# Altium PCB VYLTIOT0OSM-SF.PcbDoc
Units mm, origin at the board's own origin, x right, y up, seen from the top; angles counter-clockwise.
Board outline 30 x 30 mm, 4 copper layers (L1, L2, L3, L4), stack 1.58 mm thick; 360 components, 291 nets, 445 pads, 58 vias.
Unrouted connection lines stored in the file: 97.
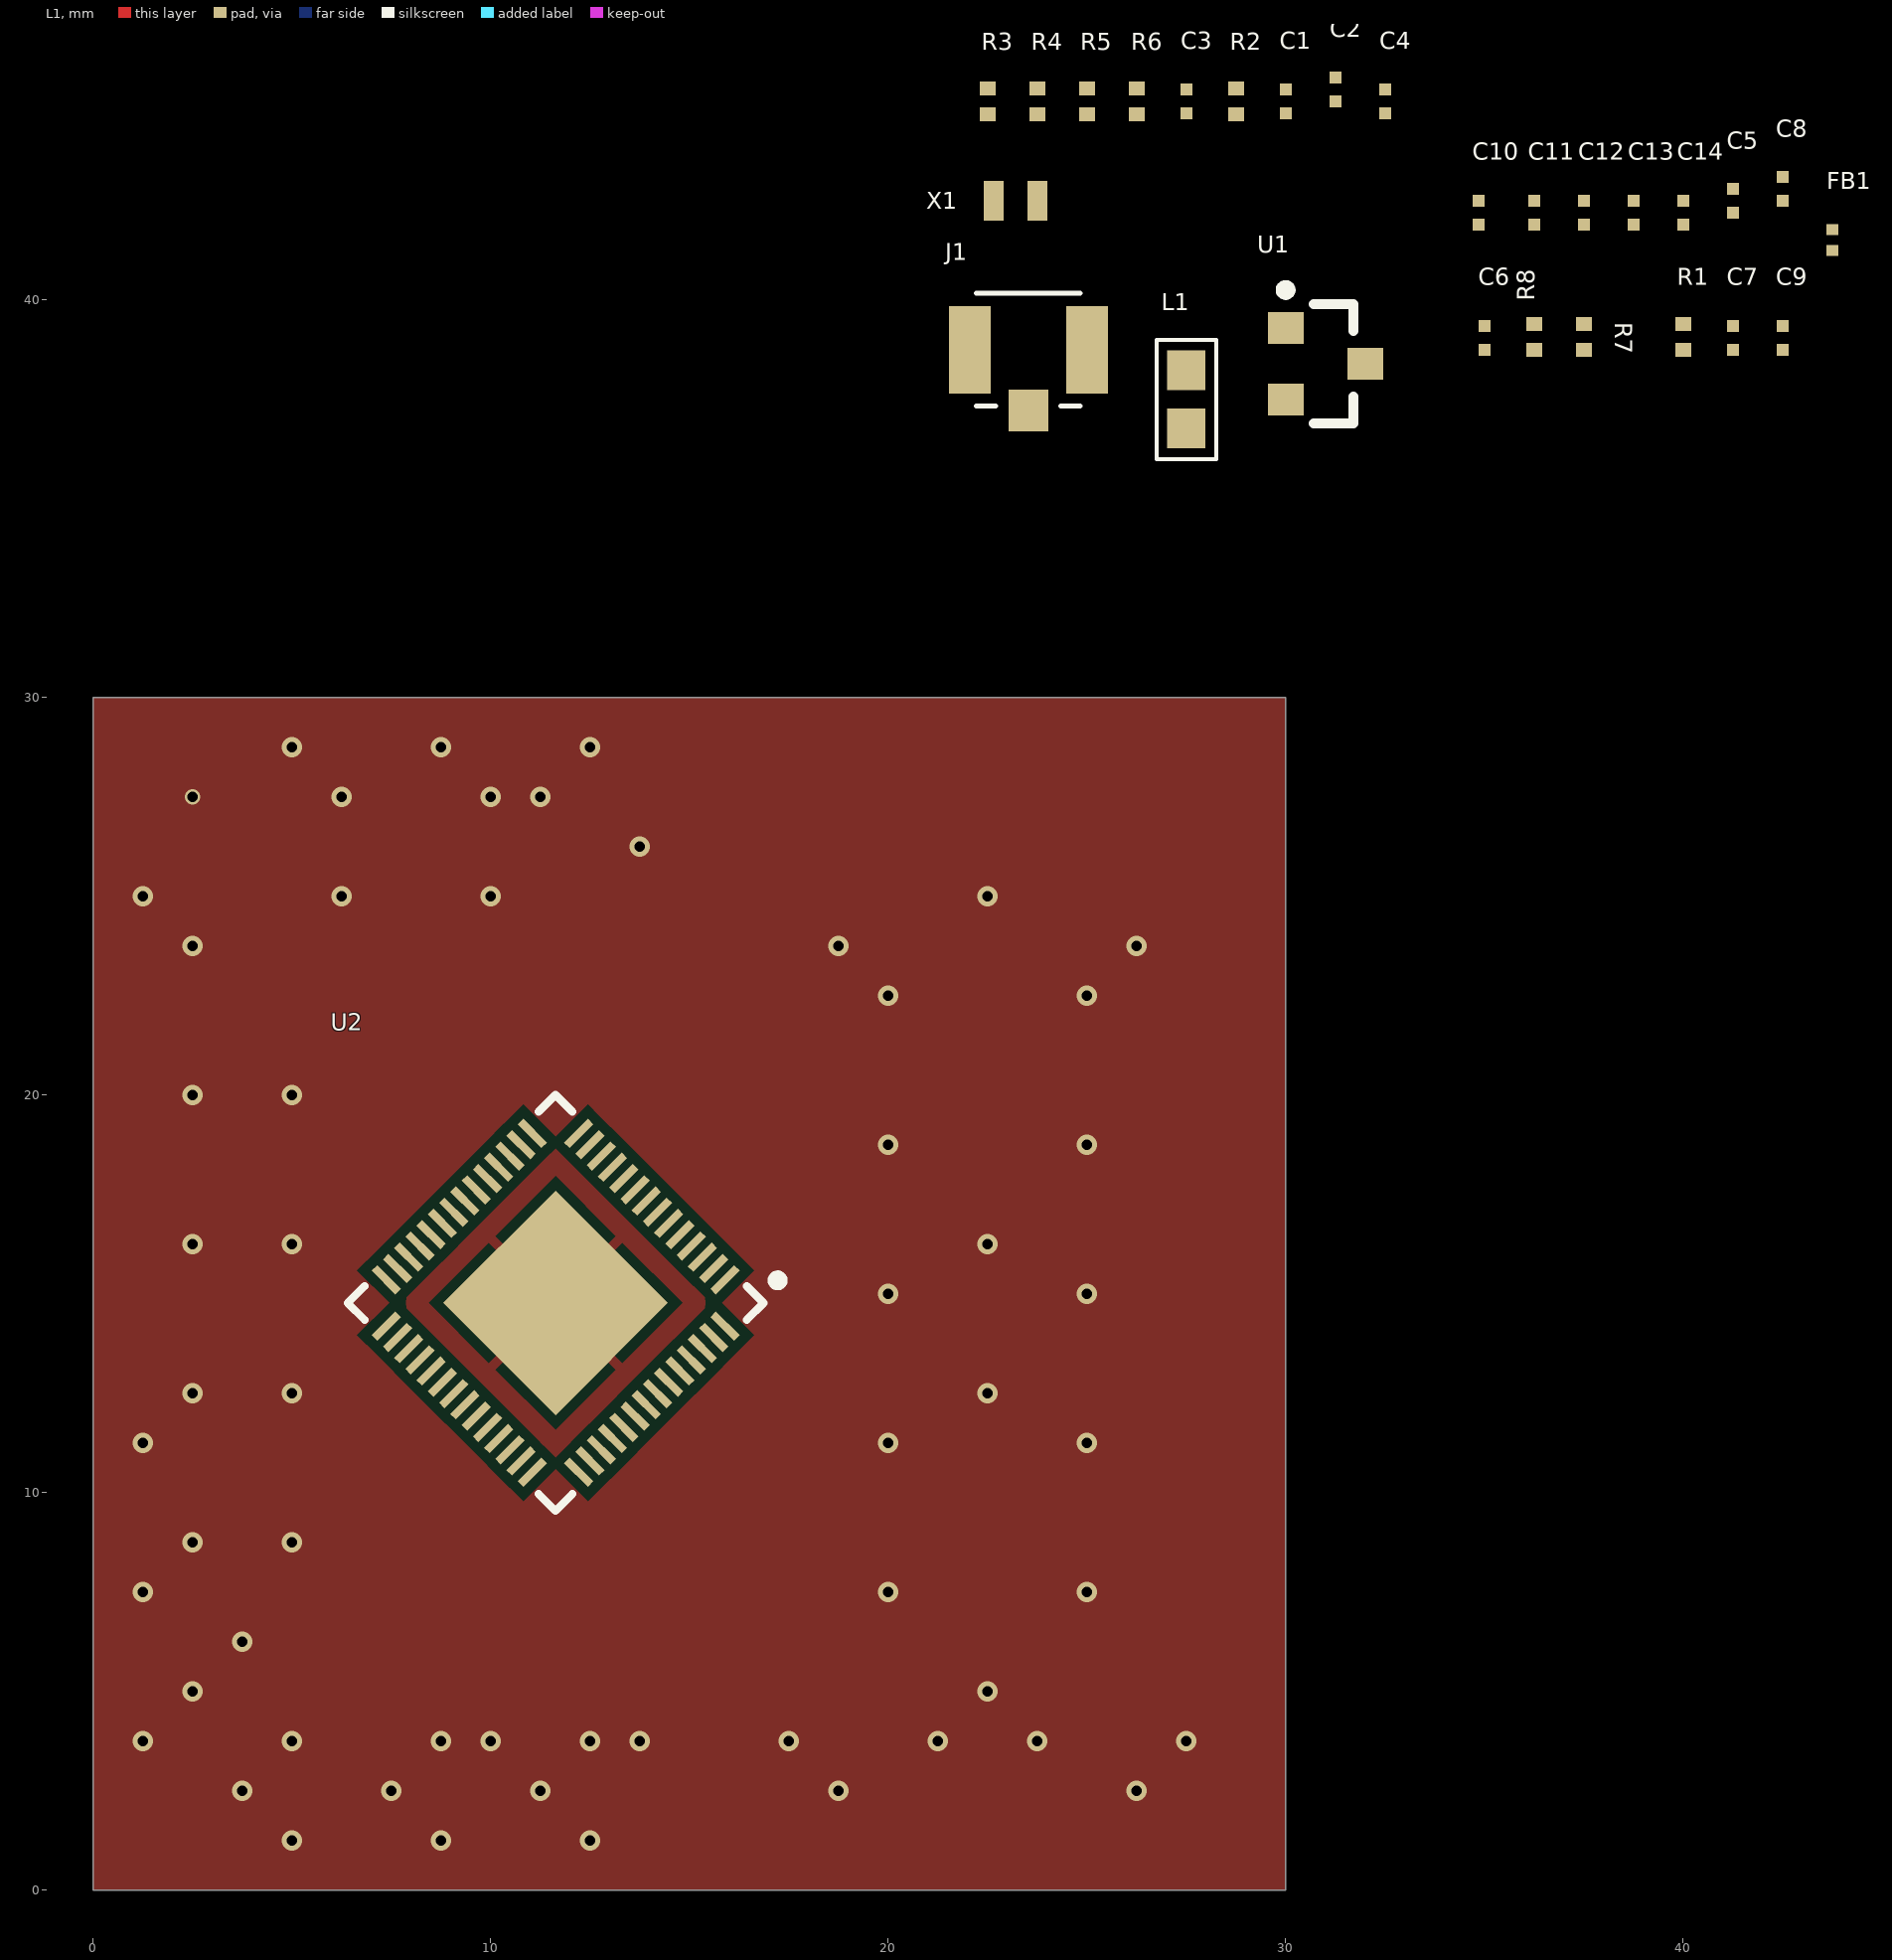
[diagram p0: L1 view]
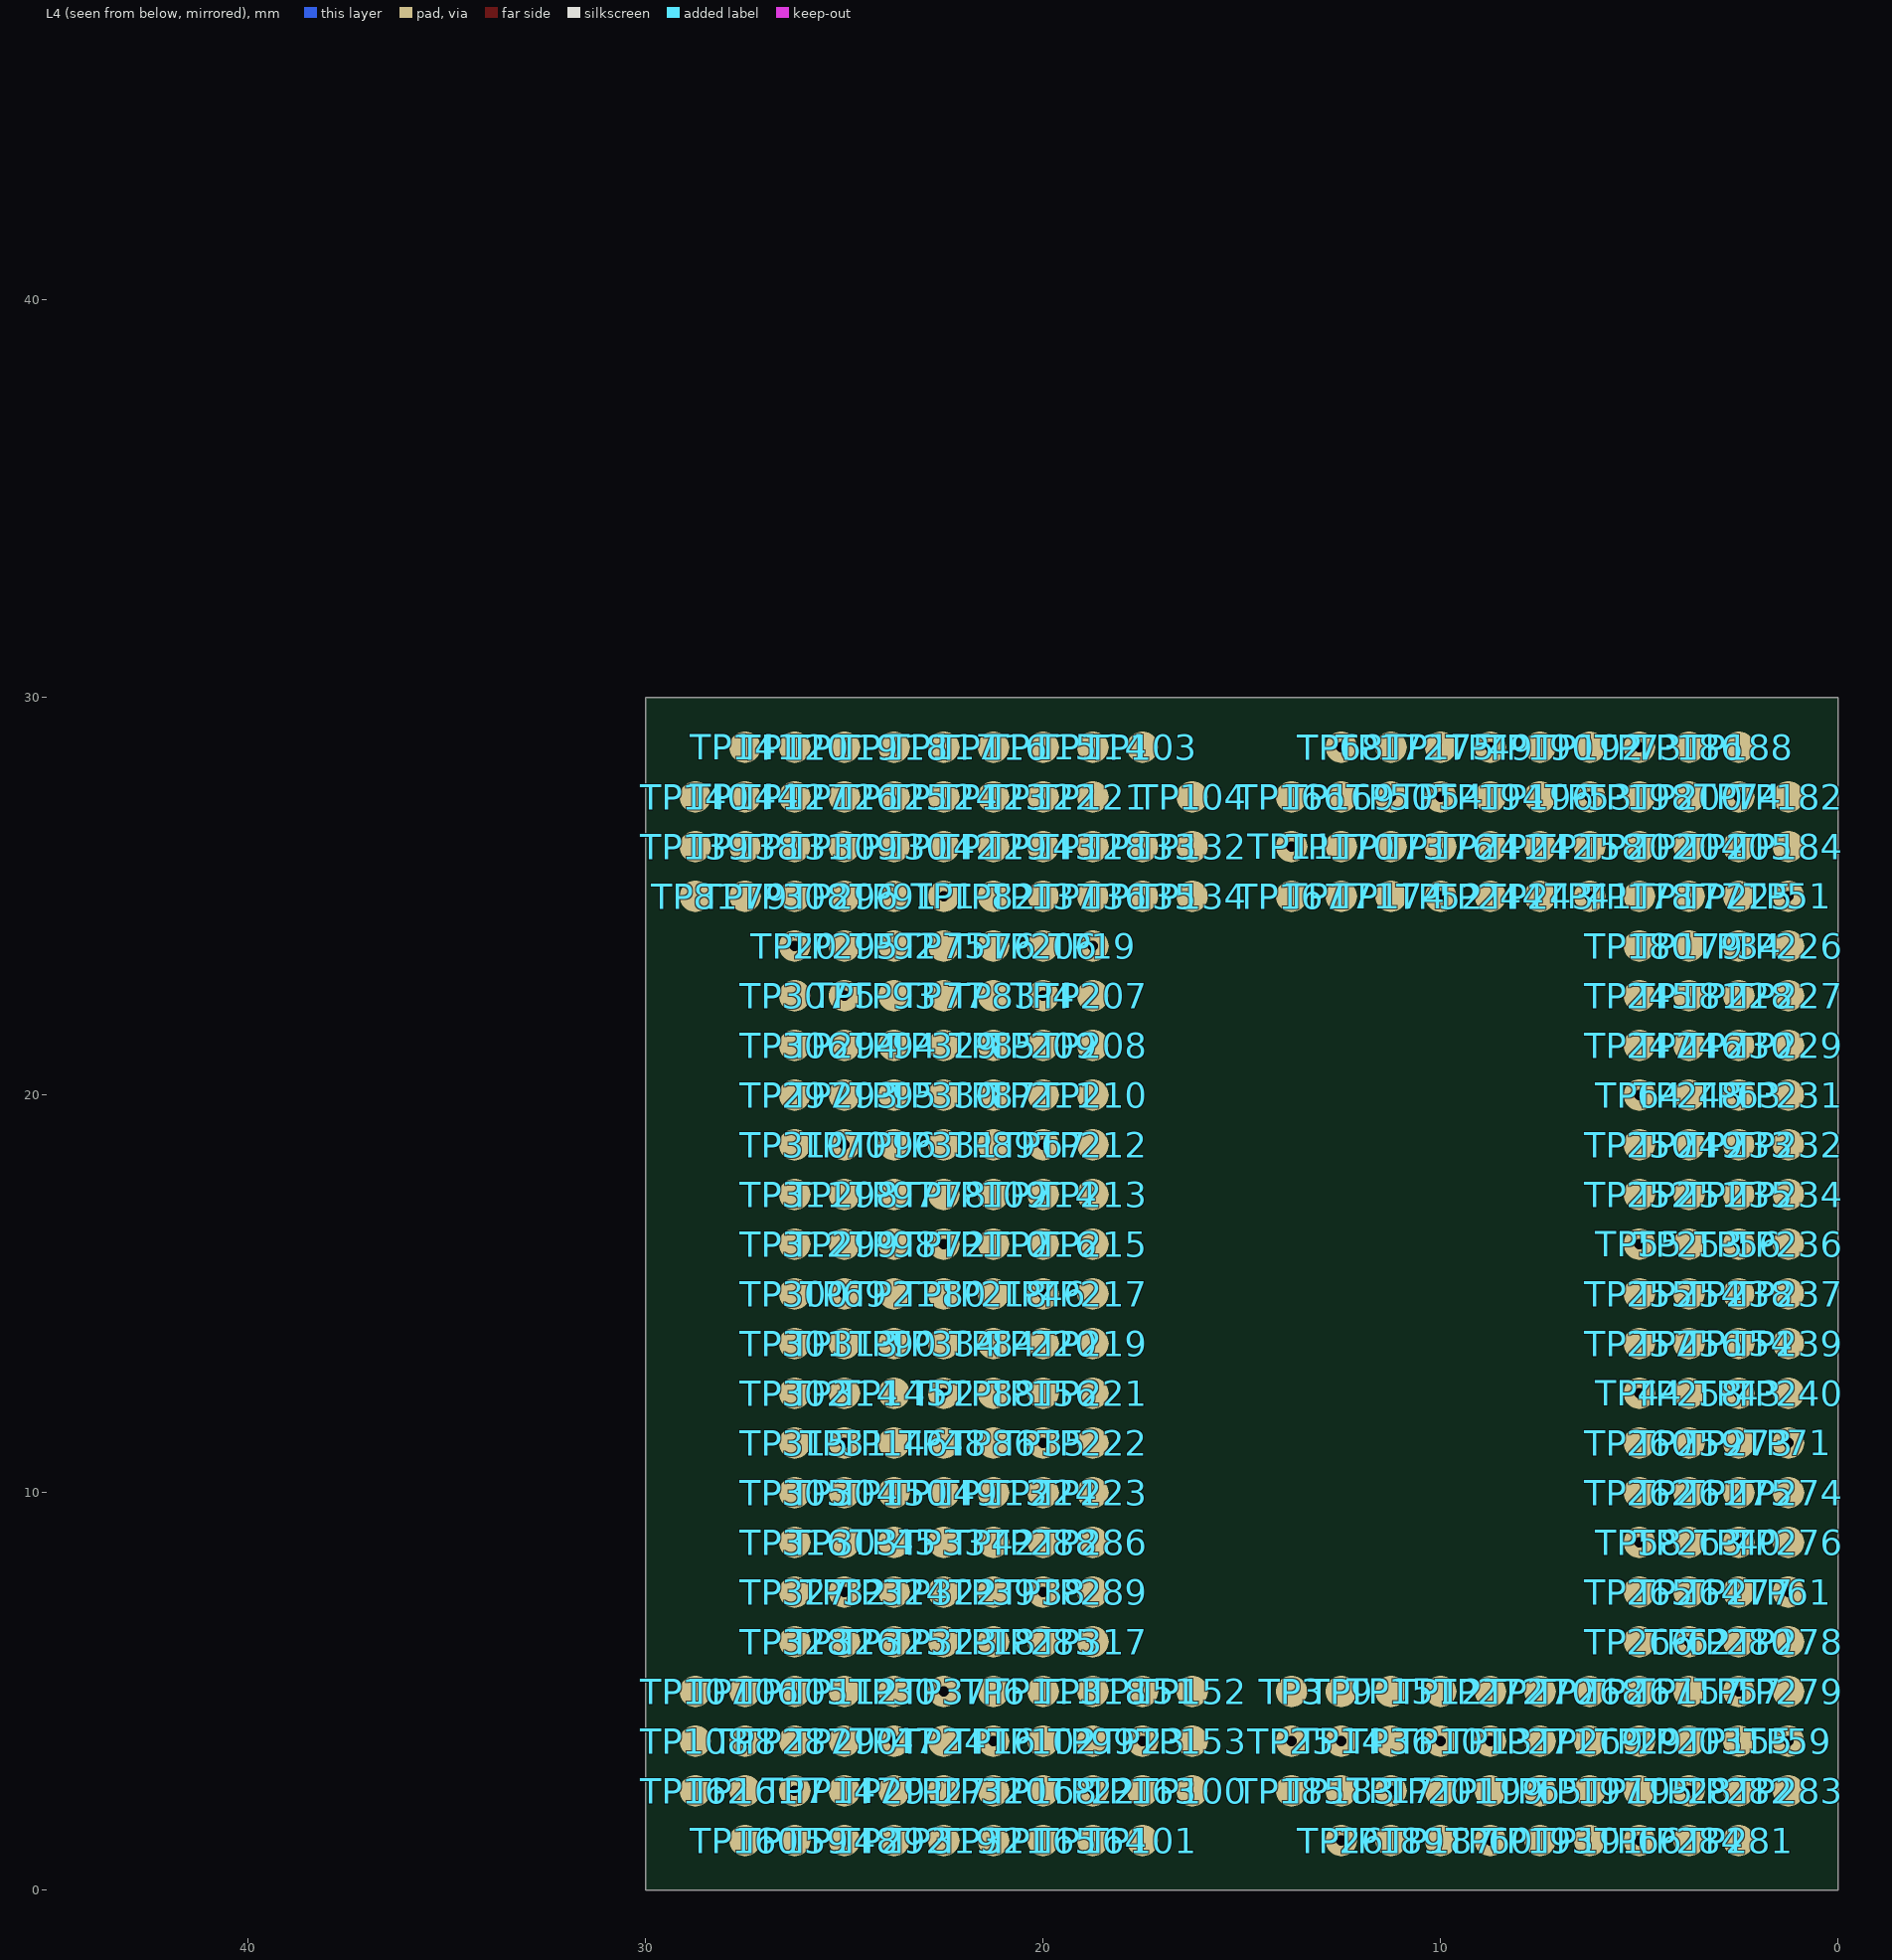
[diagram p1: L4 view, seen from below]
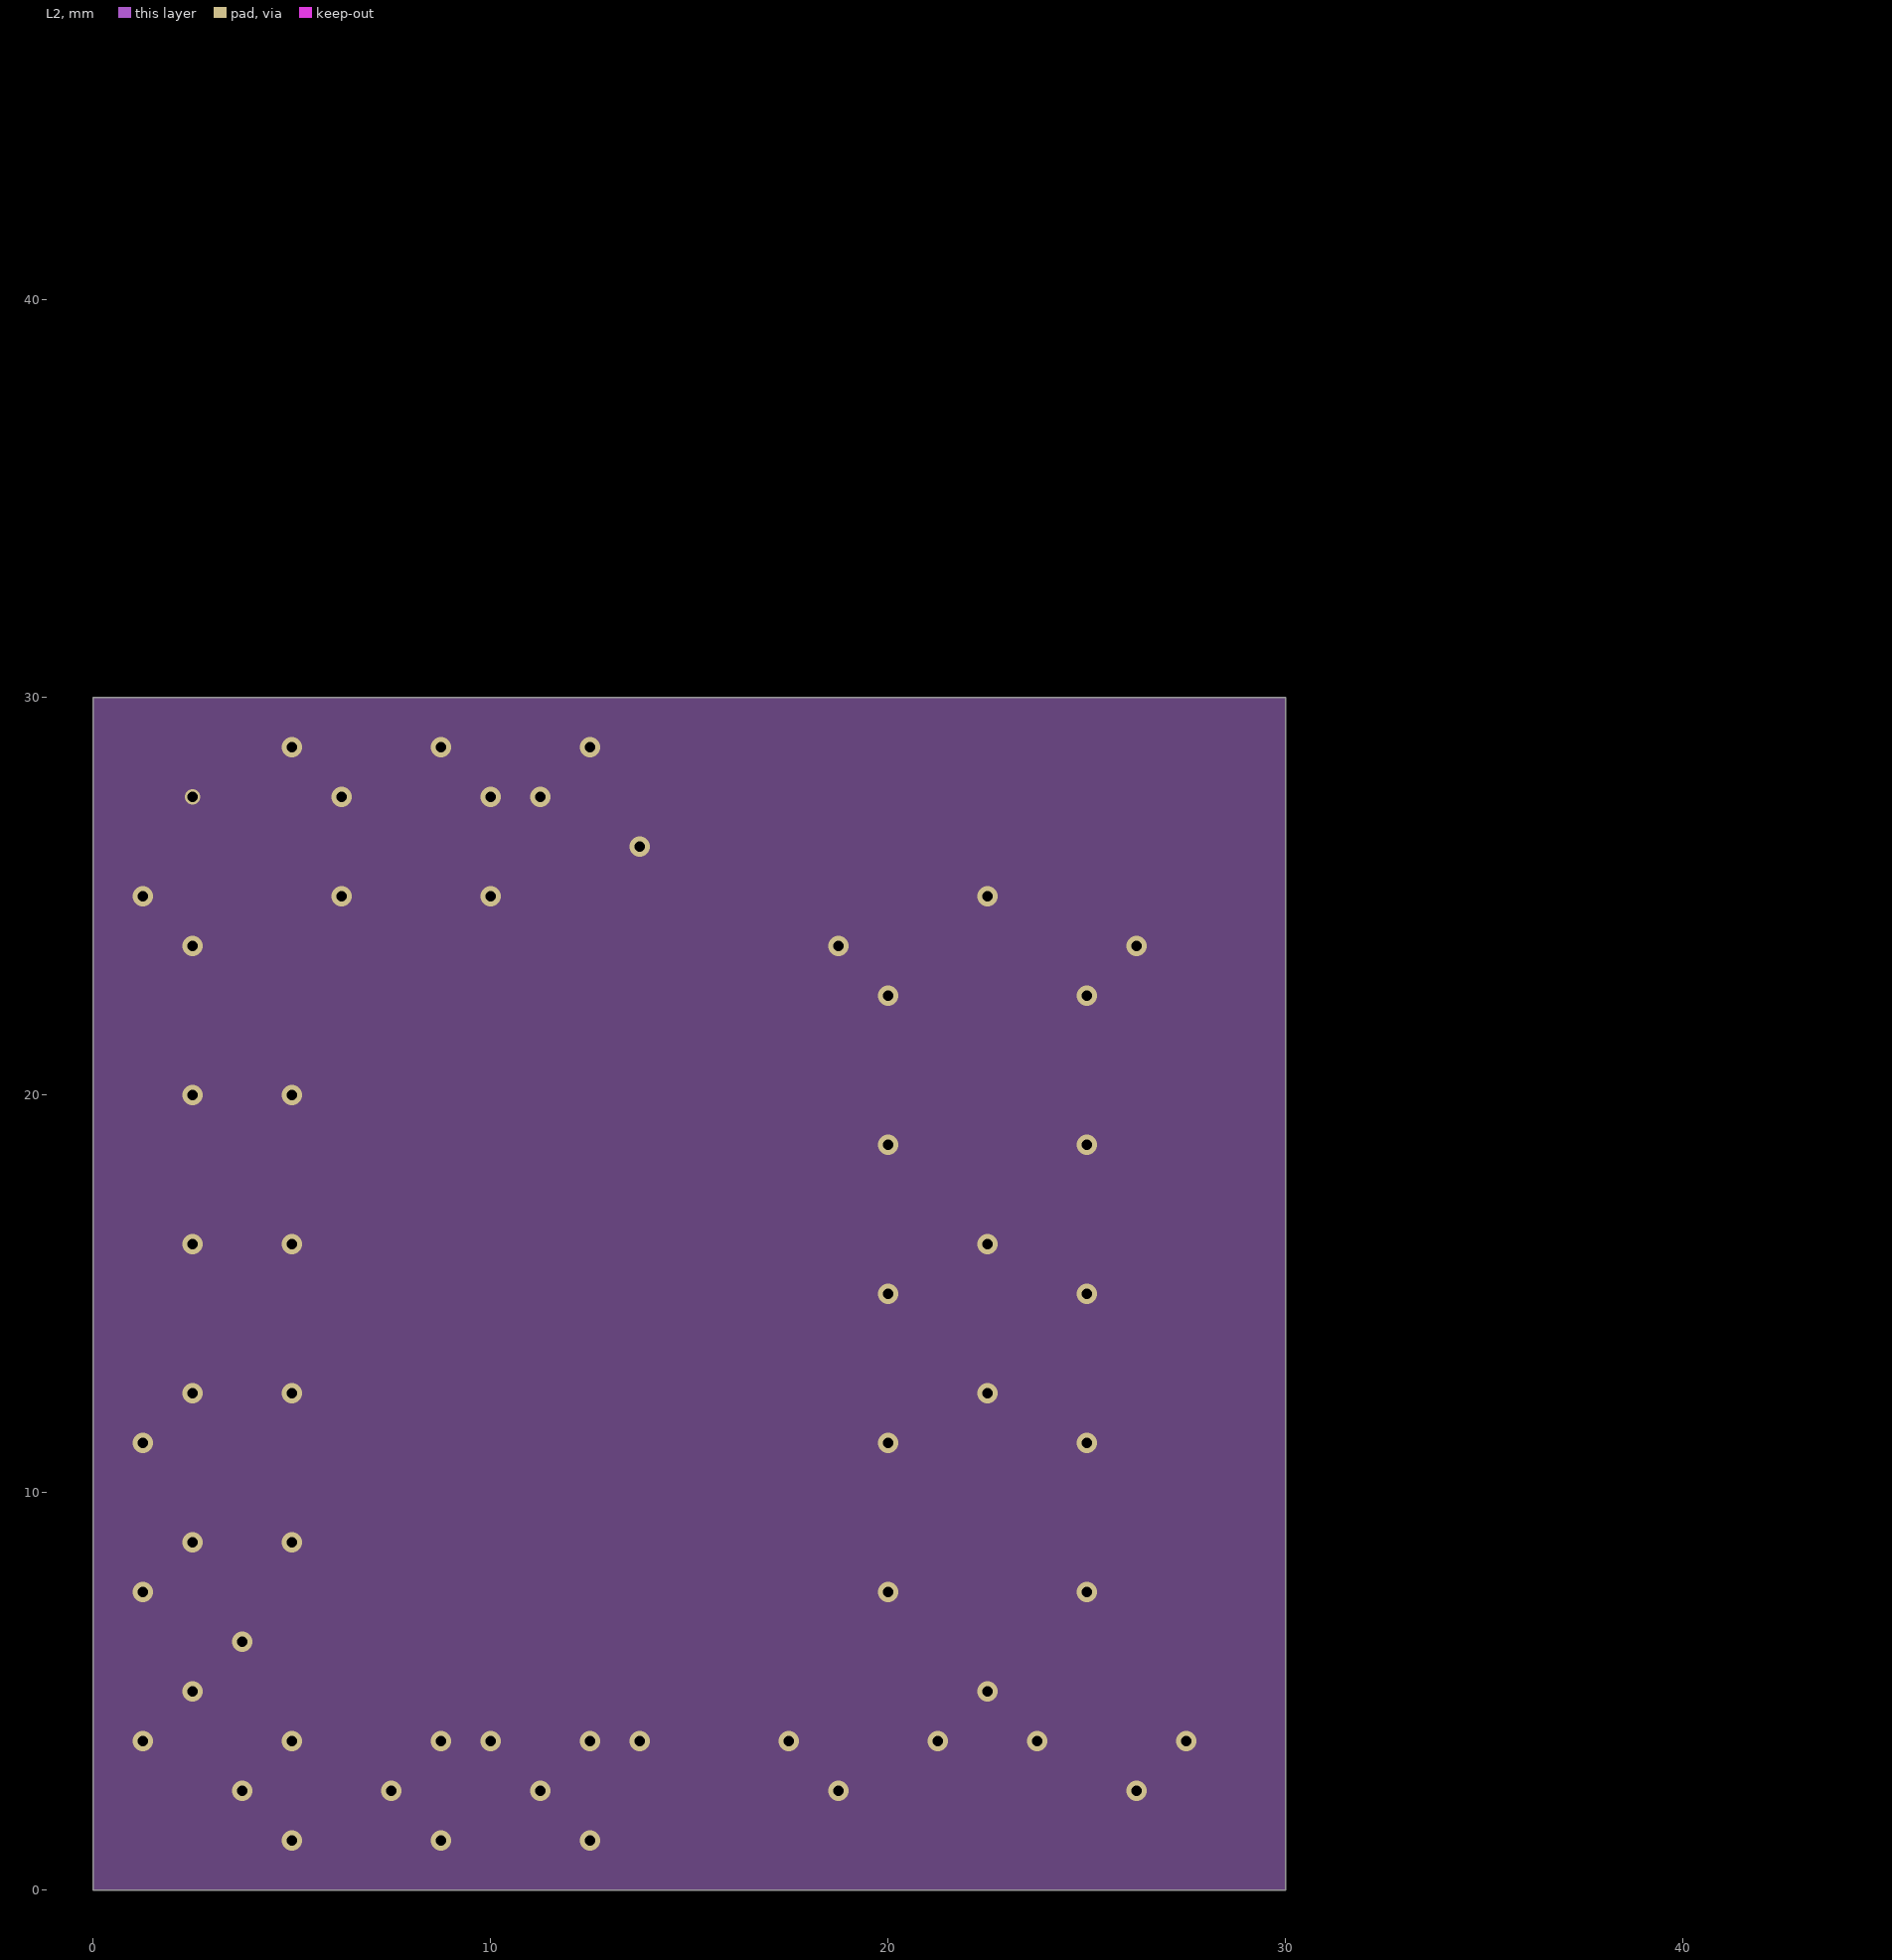
[diagram p2: L2]
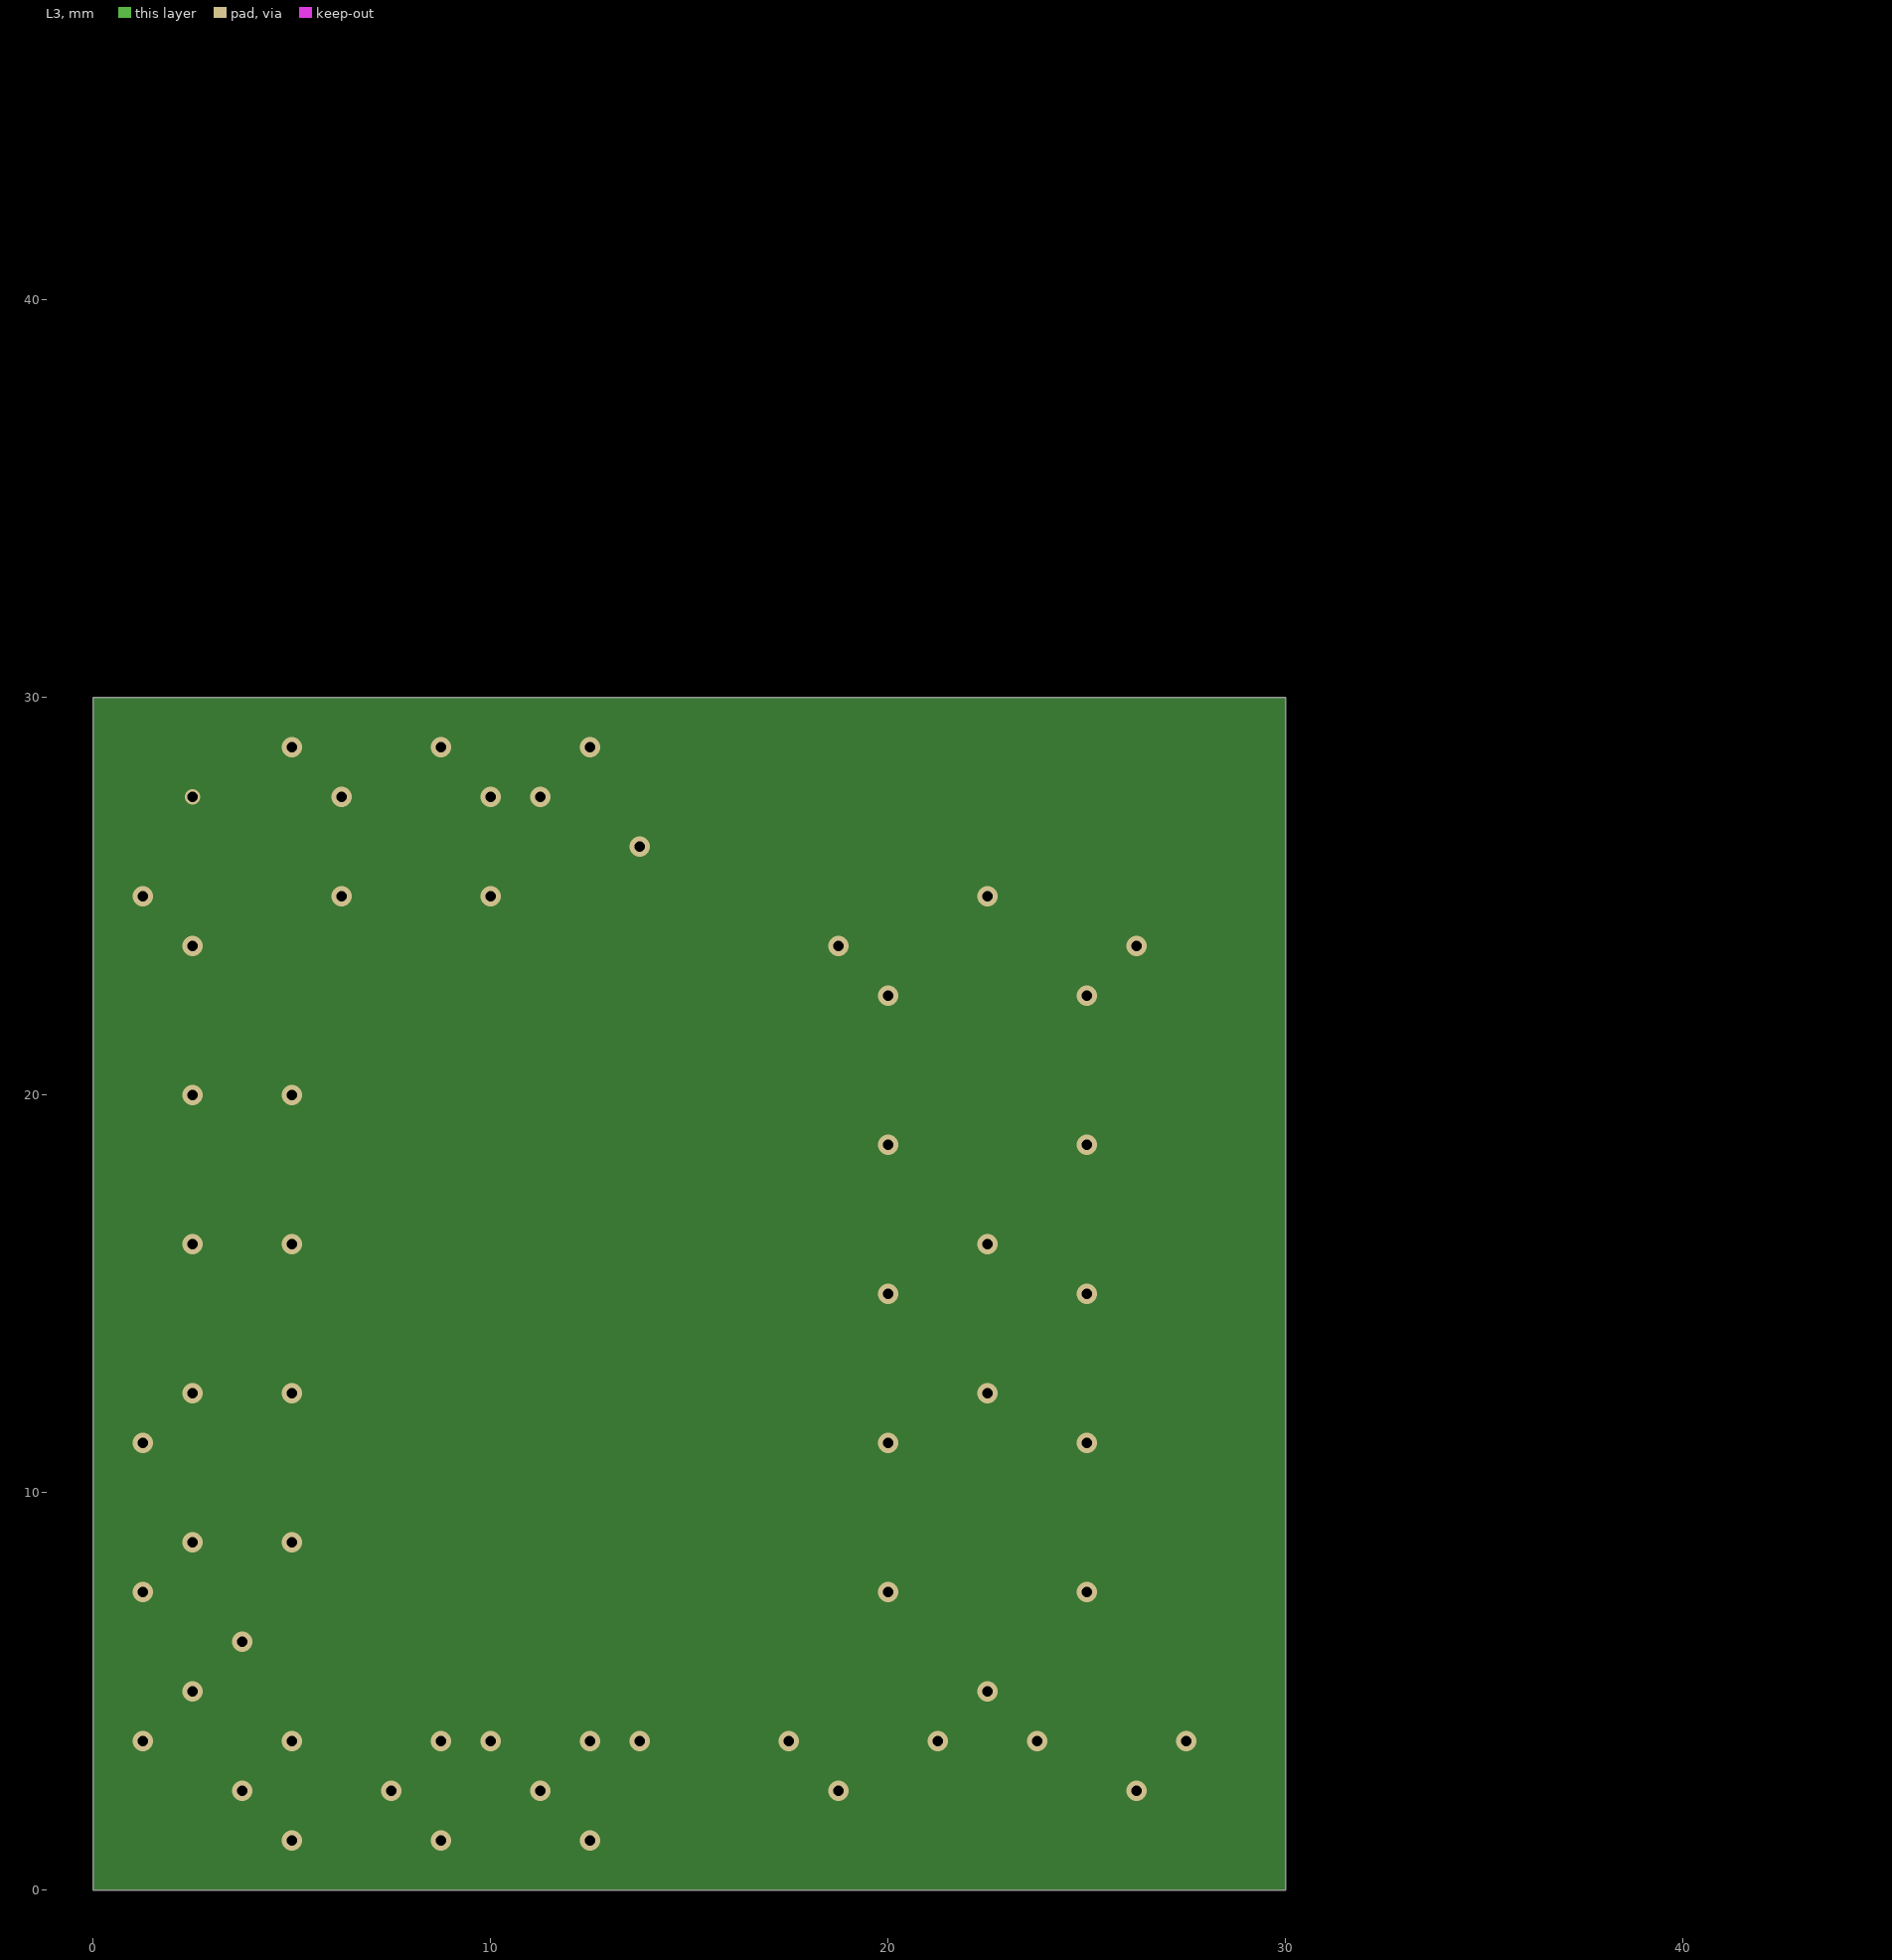
[diagram p3: L3]

## Layer stack, top to bottom
Top Solder: solder mask 0.01, Solder Resist, Dk 3.5
L1: signal copper 0.035
Dielectric 2: prepreg 0.12, PP-006, Dk 3.97
L2: signal copper 0.035
Dielectric 1: core 1.2, FR-4, Dk 4
L3: signal copper 0.035
Dielectric 3: prepreg 0.12, PP-006, Dk 3.97
L4: signal copper 0.035
Bottom Solder: solder mask 0.01, Solder Resist, Dk 3.5

## Board outline
0,0 30,0 30,30 0,30

## Design rules (kind name [scope] priority, off if disabled: settings)
Clearance [All] p1: gap=0.254 ignorepadtopadclearanceinfootprint=FALSE except(0.178: SMDPad-SMDPad)
DiffPairsRouting [All] p1: maxlimit=0.254 minlimit=0.254 mostfreqgap=0.254 toplayer_minwidth=0.381 toplayer_maxwidth=0.381 toplayer_prefwidth=0.381 midlayer1_minwidth=0.381 midlayer1_maxwidth=0.381 midlayer1_prefwidth=0.381 midlayer2_minwidth=0.381 midlayer2_maxwidth=0.381 midlayer2_prefwidth=0.381 bottomlayer_minwidth=0.381 bottomlayer_maxwidth=0.381 bottomlayer_prefwidth=0.381 maxuncoupledlength=12.7
PolygonConnect [All] p1: connectstyle=Relief reliefconductorwidth=0.254 reliefentries=4 polygonreliefangle="90 Angle" airgapwidth=0.254
RoutingVias [All] p1: holewidth=0.711 width=1.27 viastyle="Through Hole" minholewidth=0.1 minwidth=0.1 maxholewidth=0.711 maxwidth=1.27
SolderMaskExpansion [All] p1: expansion=0.102 istentingtop=FALSE
SupplyNets "Schematic Supply Nets_11" [InNet('VCC_IN_3V3')] p1: voltage=0.000
SupplyNets "Schematic Supply Nets_10" [InNet('VCC_OUT_IO')] p2: voltage=0.000
SupplyNets "Schematic Supply Nets_9" [InNet('RTC_PWR')] p3: voltage=0.000
SupplyNets "Schematic Supply Nets_8" [InNet('VBATT')] p4: voltage=0.000
SupplyNets "Schematic Supply Nets_6" [InNet('3V3A_ESP')] p5: voltage=0.000
SupplyNets "Schematic Supply Nets_5" [InNet('VCC_IN_5V')] p6: voltage=0.000
SupplyNets "Schematic Supply Nets_4" [InNet('3V3_ESP')] p7: voltage=0.000
SupplyNets "Schematic Supply Nets_2" [InNet('GND')] p8: voltage=0.000
Width [All] p1: maxlimit=0.254 minlimit=0.254 preferedwidth=0.254
29 further rules are at their usual default settings.

## Classes and differential pairs
net class TP334_Nets: ADC_1
net class TP331_Nets: PWM_4
net class TP330_Nets: PWM_3
net class TP329_Nets: PWM_2
net class TP77_Nets: PWM_1
net class TP75_Nets: PWM_0
net class TP328_Nets: I2S_A_DOUT
net class TP327_Nets: I2S_A_DIN
net class TP326_Nets: I2S_BITCLK
net class TP325_Nets: I2S_B_DOUT
net class TP324_Nets: I2S_B_DIN
net class TP323_Nets: I2S_LRCLK
net class TP322_Nets: I2S_MCLK
net class TP321_Nets: CAN_A_P
net class TP320_Nets: CAN_A_N
net class TP319_Nets: DEBUG_EN
net class TP318_Nets: NC73
net class TP317_Nets: NC72
net class TP316_Nets: NC71
net class TP315_Nets: NC70
net class TP314_Nets: NC69
net class TP313_Nets: NC68
net class TP312_Nets: NC67
net class TP311_Nets: NC66
net class TP310_Nets: NC65
net class TP309_Nets: NC64
net class TP308_Nets: NC63
net class TP307_Nets: NC62
net class TP306_Nets: NC61
net class TP305_Nets: NC60
net class TP304_Nets: NC59
net class TP303_Nets: NC58
net class TP302_Nets: NC57
net class TP301_Nets: NC56
net class TP300_Nets: NC55
net class TP299_Nets: NC54
net class TP298_Nets: NC53
net class TP297_Nets: NC52
net class TP296_Nets: NC51
net class TP295_Nets: NC50
net class TP294_Nets: NC49
net class TP293_Nets: NC48
net class TP292_Nets: NC47
net class TP291_Nets: NC46
net class TP290_Nets: NC45
net class TP289_Nets: NC44
net class TP288_Nets: NC43
net class TP287_Nets: NC42
net class TP286_Nets: NC41
net class TP285_Nets: NC40
net class TP284_Nets: PCI_A_HSI0_N
net class TP283_Nets: PCI_A_HSI0_P
net class TP282_Nets: PCI_A_HSI0_N
net class TP281_Nets: PCI_A_HSI0_P
net class TP280_Nets: PCI_CLKREQ_N
net class TP279_Nets: PCI_REFCLK_N
net class TP278_Nets: PCI_REFCLK_P
net class TP277_Nets: PCI_A_PERST_N
net class TP276_Nets: PCI_SMDAT
net class TP275_Nets: PCI_WAKE
net class TP274_Nets: PCI_SMCLK
net class TP273_Nets: PCI_SM_ALERT_N
component class PCIE: TP273 TP274 TP275 TP276 TP277 TP278 TP279 TP280 TP281 TP282 TP283 TP284
net class TP272_Nets: RGB_R0
net class TP271_Nets: RGB_R1
net class TP270_Nets: RGB_R2
net class TP269_Nets: RGB_R3
net class TP268_Nets: RGB_R4
net class TP267_Nets: RGB_R5
net class TP266_Nets: RGB_G0
net class TP265_Nets: RGB_G2
net class TP264_Nets: RGB_G1
net class TP263_Nets: RGB_G3
net class TP262_Nets: RGB_G5
net class TP261_Nets: RGB_G4
net class TP260_Nets: RGB_B0
net class TP259_Nets: TGB_B1
net class TP258_Nets: RGB_B2
net class TP257_Nets: RGB_B4
net class TP256_Nets: RGB_B3
net class TP255_Nets: RGB_CLK
net class TP254_Nets: RGB_B5
net class TP253_Nets: RGB_VSYNC
net class TP252_Nets: RGB_DISP
net class TP251_Nets: RGB_HSYNC
net class TP250_Nets: RGB_DE
net class TP249_Nets: RGB_RSTN
net class TP248_Nets: RGB_CSN
component class DISPLAY: TP248 TP249 TP250 TP251 TP252 TP253 TP254 TP255 TP256 TP257 TP258 TP259 TP260 TP261 TP262 TP263 TP264 TP265 TP266 TP267 TP268 TP269 TP270 TP271 TP272
net class TP247_Nets: NC39
net class TP246_Nets: NC38
net class TP245_Nets: NC37
net class TP244_Nets: UD5
net class TP243_Nets: UD4
net class TP242_Nets: ETH_B_MDC
net class TP241_Nets: ETH_B_MDIO
net class TP240_Nets: ETH_B_RXCLK
net class TP239_Nets: ETH_B_RXD3
net class TP238_Nets: ETH_B_SDP
net class TP237_Nets: ETH_B_RXD2
net class TP236_Nets: ETH_B_RXDV
net class TP235_Nets: ETH_B_RXER
net class TP234_Nets: ETH_B_RXD1
net class TP233_Nets: ETH_B_TXER
net class TP232_Nets: ETH_B_RXD0
net class TP231_Nets: ETH_B_TXCLK
net class TP230_Nets: ETH_B_TXD2
net class TP229_Nets: ETH_B_TXD0
net class TP228_Nets: ETH_B_TXD3
net class TP227_Nets: ETH_B_TXD1
net class TP226_Nets: ETH_B_COL
net class TP225_Nets: ETH_B_CRS
net class TP224_Nets: ETH_A_MDC
net class TP223_Nets: ETH_A_MDIO
net class TP222_Nets: ETH_A_RXCLK
net class TP221_Nets: ETH_A_RXD3
net class TP220_Nets: ETH_A_SDP
net class TP219_Nets: ETH_A_RXD2
net class TP218_Nets: ETH_A_IOPWR
net class TP217_Nets: ETH_A_RXDV
net class TP216_Nets: ETH_A_RXER
net class TP215_Nets: ETH_A_RXD1
net class TP214_Nets: ETH_A_TXER
net class TP213_Nets: ETH_A_RXD0
net class TP212_Nets: ETH_A_CLK
net class TP211_Nets: ETH_A_TXD2
net class TP210_Nets: ETH_A_TXD0
net class TP209_Nets: ETH_A_TXD3
net class TP208_Nets: ETH_A_TXD1
net class TP207_Nets: ETH_A_COL
net class TP206_Nets: ETH_A_CRS
component class ETHERNET: TP206 TP207 TP208 TP209 TP210 TP211 TP212 TP213 TP214 TP215 TP216 TP217 TP218 TP219 TP220 TP221 TP222 TP223 TP224 TP225 TP226 TP227 TP228 TP229 TP230 TP231 TP232 TP233 TP234 TP235 TP236 TP237 TP238 TP239 TP240 TP241 TP242
net class TP205_Nets: CSI_MCK
net class TP204_Nets: CSI_TX_N
net class TP203_Nets: DSI_TE
net class TP202_Nets: CSI_TX_P
net class TP201_Nets: DSI_CLOCK_N
net class TP200_Nets: CSI_CLOCK_N
net class TP199_Nets: DSI_CLOCK_P
net class TP198_Nets: CSI_CLOCK_P
net class TP197_Nets: DSI_DATA3_N
net class TP196_Nets: CSI_DATA3_N
net class TP195_Nets: DSI_DATA3_P
net class TP194_Nets: CSI_DATA3_P
net class TP193_Nets: DSI_DATA2_N
net class TP192_Nets: CSI_DATA2_N
net class TP191_Nets: DSI_DATA2_P
net class TP190_Nets: CSI_DATA2_P
net class TP189_Nets: DSI_DATA1_N
net class TP188_Nets: CSI_DATA1_N
net class TP187_Nets: DSI_DATA1_P
net class TP186_Nets: CSI_DATA1_P
net class TP185_Nets: DSI_DATA0_N
net class TP184_Nets: CSI_DATA0_N
net class TP183_Nets: DSI_DATA0_P
net class TP182_Nets: CSI_DATA0_P
component class MIPI: TP182 TP183 TP184 TP185 TP186 TP187 TP188 TP189 TP190 TP191 TP192 TP193 TP194 TP195 TP196 TP197 TP198 TP199 TP200 TP201 TP202 TP203 TP204 TP205
net class TP181_Nets: NC36
net class TP180_Nets: NC35
net class TP179_Nets: NC34
net class TP178_Nets: NC33
net class TP177_Nets: NC32
net class TP176_Nets: NC31
net class TP175_Nets: NC30
net class TP174_Nets: NC29
net class TP173_Nets: NC28
net class TP172_Nets: NC27
net class TP171_Nets: NC26
net class TP170_Nets: NC25
net class TP169_Nets: NC24
net class TP168_Nets: USB_A_VBUS
net class TP167_Nets: NC23
net class TP166_Nets: NC22
net class TP165_Nets: NC21
net class TP164_Nets: NC20
net class TP163_Nets: NC19
net class TP162_Nets: NC18
net class TP161_Nets: NC17
net class TP160_Nets: NC16
net class TP159_Nets: NC15
net class TP158_Nets: VCC_6_TEST
net class TP157_Nets: VCC_5_TEST
net class TP112_Nets: VCC_4_TEST
net class TP111_Nets: VCC_3_TEST
net class TP21_Nets: VCC_2_TEST
net class TP156_Nets: UD3
net class TP144_Nets: UD2
net class TP145_Nets: NC11
net class TP155_Nets: RSV7
net class TP154_Nets: RSV6
net class TP153_Nets: RSV5
net class TP152_Nets: RSV4
net class TP151_Nets: RSV3
net class TP150_Nets: RSV2
net class TP149_Nets: RSV1
net class TP147_Nets: NC13
net class TP146_Nets: NC12
net class TP148_Nets: NC14
net class TP143_Nets: UD1
net class TP142_Nets: TEST_GENERIC
net class TP141_Nets: NC10
net class TP140_Nets: NC9
net class TP139_Nets: NC8
net class TP138_Nets: NC7
net class TP137_Nets: NC6
net class TP136_Nets: NC5
net class TP135_Nets: NC4
net class TP134_Nets: NC3
net class TP133_Nets: NC2
net class TP132_Nets: NC1
component class TEST_MECH: TP21 TP111 TP112 TP132 TP133 TP134 TP135 TP136 TP137 TP138 TP139 TP140 TP141 TP142 TP143 TP144 TP145 TP146 TP147 TP148 TP149 TP150 TP151 TP152 TP153 TP154 TP155 TP156 TP157 TP158 TP159 TP160 TP161 TP162 TP163 TP164 TP165 TP166 TP167 TP169 TP170 TP171 TP172 TP173 TP174 TP175 TP176 TP177 TP178 TP179 TP180 TP181 TP243 TP244 TP245 TP246 TP247 TP285 TP286 TP287 TP288 TP289 TP290 TP291 TP292 TP293 TP294 TP295 TP296 TP297 TP298 TP299 TP300 TP301 TP302 TP303 TP304 TP305 TP306 TP307 TP308 TP309 TP310 TP311 TP312 TP313 TP314 TP315 TP316 TP317 TP318 TP319
net class TP131_Nets: COMM_ARR18
net class TP130_Nets: COMM_ARR17
net class TP129_Nets: COMM_ARR16
net class TP128_Nets: COMM_ARR15
net class TP127_Nets: COMM_ARR14
net class TP126_Nets: COMM_ARR13
net class TP125_Nets: COMM_ARR12
net class TP124_Nets: COMM_ARR11
net class TP123_Nets: COMM_ARR10
net class TP122_Nets: COMM_ARR09
net class TP121_Nets: COMM_ARR08
net class TP120_Nets: COMM_ARR07
net class TP119_Nets: COMM_ARR06
net class TP118_Nets: COMM_ARR05
net class TP117_Nets: COMM_ARR04
net class TP116_Nets: COMM_ARR03
net class TP115_Nets: COMM_ARR02
net class TP114_Nets: COMM_ARR01
component class RF: TP114 TP115 TP116 TP117 TP118 TP119 TP120 TP121 TP122 TP123 TP124 TP125 TP126 TP127 TP128 TP129 TP130 TP131
net class TP113_Nets: N_FRC_RECV
net class TP54_Nets: GND
net class TP36_Nets: N_PWR_BTN
net class TP35_Nets: GND
net class TP34_Nets: GND
net class TP33_Nets: VCC_OUT_IO
net class TP32_Nets: GND
net class TP31_Nets: GND
net class TP30_Nets: VCC_IN_3V3
net class TP29_Nets: GND
net class TP28_Nets: GND
net class TP27_Nets: VBATT
net class TP25_Nets: GND
net class TP24_Nets: VBATT
net class TP20_Nets: GND
net class TP19_Nets: GND
net class TP18_Nets: RTC_PWR
net class TP17_Nets: GND
net class TP16_Nets: GND
net class TP15_Nets: VCC_IN_5V
net class TP14_Nets: GND
net class TP13_Nets: GND
net class TP12_Nets: VCC_IN_5V
net class TP11_Nets: GND
net class TP9_Nets: VCC_IN_5V
net class TP8_Nets: GND
net class TP7_Nets: GND
net class TP5_Nets: GND
net class TP4_Nets: GND
net class TP3_Nets: VCC_IN_5V
net class TP2_Nets: GND
net class TP1_Nets: GND
net class R8_Nets: IO20 USB_P
net class R7_Nets: IO19 USB_N
net class TP101_Nets: USB_P
net class TP100_Nets: USB_N
net class TP26_Nets: GND
net class TP51_Nets: GND
net class TP10_Nets: GND
net class TP74_Nets: GND
net class TP73_Nets: GND
net class TP72_Nets: GND
net class TP71_Nets: GND
net class TP70_Nets: GND
net class TP69_Nets: GND
net class TP68_Nets: GND
net class TP67_Nets: GND
net class TP66_Nets: GND
net class TP65_Nets: GND
net class TP64_Nets: GND
net class TP63_Nets: GND
net class TP62_Nets: GND
net class TP61_Nets: GND
net class TP60_Nets: GND
net class TP59_Nets: GND
net class TP58_Nets: GND
net class TP57_Nets: GND
net class TP56_Nets: GND
net class TP55_Nets: GND
net class TP6_Nets: VCC_IN_5V
net class TP53_Nets: GND
net class TP52_Nets: GND
net class TP50_Nets: GND
net class TP49_Nets: GND
net class TP48_Nets: IO46
net class TP47_Nets: GND
net class TP46_Nets: GND
net class TP45_Nets: IO0
net class TP44_Nets: GND
net class TP43_Nets: GND
net class TP42_Nets: N_SYS_RST
net class TP41_Nets: GND
net class TP40_Nets: GND
net class TP39_Nets: CARR_PWR_EN
net class TP38_Nets: GND
net class TP37_Nets: GND
net class TP78_Nets: IO45
net class TP76_Nets: IO3
component class POWER: TP1 TP2 TP3 TP4 TP5 TP6 TP7 TP8 TP9 TP10 TP11 TP12 TP13 TP14 TP15 TP16 TP17 TP18 TP19 TP20 TP22 TP23 TP24 TP25 TP26 TP27 TP28 TP29 TP30 TP31 TP32 TP33 TP34 TP35 TP36 TP37 TP38 TP39 TP40 TP41 TP42 TP43 TP44 TP46 TP47 TP49 TP50 TP51 TP52 TP53 TP54 TP55 TP56 TP57 TP58 TP59 TP60 TP61 TP62 TP63 TP64 TP65 TP66 TP67 TP68 TP69 TP70 TP71 TP72 TP73 TP74 TP113 TP168
net class X1_Nets: NetC3_1 NetC4_1
net class U2_Nets: 3V3_ESP 3V3A_ESP EN GND IO0 IO1 IO2 IO3 IO4 IO5 IO6 IO7 IO8 IO9 IO10 IO11 IO12 IO13 IO14 IO17 IO18 IO19 IO20 IO21 IO33 IO34 IO35 IO36 IO37 IO38 IO45 IO46 IO47 IO48 JTCK JTDI JTDO JTMS LNA_IN NetU2_28 NetU2_29 NetU2_30 NetU2_31 NetU2_32 NetU2_33 NetU2_34 NetU2_35 NetU2_53 NetU2_54 RTC_PWR U0RXD U0TXD X32_N X32_P
net class U1_Nets: 3V3_ESP EN GND
net class TP110_Nets: IO38
net class TP109_Nets: IO37
net class TP108_Nets: IO36
net class TP107_Nets: IO35
net class TP106_Nets: IO34
net class TP105_Nets: IO33
net class TP104_Nets: IO47
net class TP103_Nets: IO48
net class TP102_Nets: IO21
net class TP23_Nets: GND
net class TP22_Nets: GND
net class TP99_Nets: IO18
net class TP98_Nets: IO17
net class TP97_Nets: IO14
net class TP96_Nets: IO13
net class TP95_Nets: IO12
net class TP94_Nets: IO11
net class TP93_Nets: IO10
net class TP92_Nets: IO9
net class TP91_Nets: IO8
net class TP90_Nets: JTMS
net class TP89_Nets: IO7
net class TP88_Nets: JTDI
net class TP87_Nets: IO6
net class TP86_Nets: JTDO
net class TP85_Nets: IO5
net class TP84_Nets: JTCK
net class TP83_Nets: IO4
net class TP82_Nets: IO2
net class TP81_Nets: UART_CON_TX
net class TP80_Nets: IO1
net class TP79_Nets: UART_CON_RX
net class R6_Nets: NetC4_1 X32_P
net class R5_Nets: NetC3_1 NetC4_1
net class R4_Nets: NetC3_1 X32_N
net class R3_Nets: U0TXD UART_CON_TX
net class R2_Nets: U0RXD UART_CON_RX
net class R1_Nets: 3V3_ESP EN
net class L1_Nets: LNA_IN NetC2_1
net class J1_Nets: GND NetC2_1
net class FB1_Nets: 3V3_ESP 3V3A_ESP
net class C14_Nets: 3V3_ESP GND
net class C13_Nets: 3V3_ESP GND
net class C12_Nets: 3V3_ESP GND
net class C11_Nets: GND RTC_PWR
net class C10_Nets: GND RTC_PWR
net class C9_Nets: 3V3A_ESP GND
net class C8_Nets: 3V3_ESP GND
net class C7_Nets: 3V3_ESP GND
net class C6_Nets: 3V3_ESP GND
net class C5_Nets: 3V3_ESP GND
net class C4_Nets: GND NetC4_1
net class C3_Nets: GND NetC3_1
net class C2_Nets: GND NetC2_1
net class C1_Nets: GND LNA_IN
component class MCU: C1 C2 C3 C4 C5 C6 C7 C8 C9 C10 C11 C12 C13 C14 FB1 J1 L1 R1 R2 R3 R4 R5 R6 R7 R8 TP45 TP48 TP75 TP76 TP77 TP78 TP79 TP80 TP81 TP82 TP83 TP84 TP85 TP86 TP87 TP88 TP89 TP90 TP91 TP92 TP93 TP94 TP95 TP96 TP97 TP98 TP99 TP100 TP101 TP102 TP103 TP104 TP105 TP106 TP107 TP108 TP109 TP110 TP320 TP321 TP322 TP323 TP324 TP325 TP326 TP327 TP328 TP329 TP330 TP331 TP334 U1 U2 X1
differential pair CAN_A: +CAN_A_P -CAN_A_N
differential pair USB: +USB_P -USB_N
differential pair X32: +X32_P -X32_N

## Components (designator, comment, footprint, x,y, rotation, side; value= is the part's Value field where it differs from the comment)
C1 "ERP_102-1" CAPC0603X03L 30,45 r90 top value=NA
C2 "ERP_102-1" CAPC0603X03L 31.25,45.3 r90 top value=NA
C3 "ERP_102-1" CAPC0603X03L 27.5,45 r270 top value=8pF
C4 "ERP_102-1" CAPC0603X03L 32.5,45 r90 top value=8pF
C5 "ERP_102-1" CAPC0603X03L 41.25,42.5 r90 top value=10n
C6 "ERP_102-1" CAPC0603X03L 35,39.05 r90 top value=10n
C7 "ERP_102-1" CAPC0603X03L 41.25,39.05 r90 top value=10n
C8 "ERP_102-1" CAPC0603X03L 42.5,42.8 r90 top value=10n
C9 "ERP_102-1" CAPC0603X03L 42.5,39.05 r90 top value=10n
C10 "ERP_102-1" CAPC0603X03L 34.851,42.2 r270 top value=10n
C11 "ERP_102-1" CAPC0603X03L 36.25,42.2 r90 top value=100n
C12 "ERP_102-1" CAPC0603X03L 37.5,42.2 r90 top value=100n
C13 "ERP_102-1" CAPC0603X03L 38.75,42.2 r90 top value=100n
C14 "ERP_102-1" CAPC0603X03L 40,42.2 r90 top value=100n
FB1 "ERP_103-3" INDC0603X03L 43.75,41.513 r270 top value=0R
J1 "ERP_148-1" uFL_50R 23.525,37.988 r0 top
L1 "ERP_103-3" IND_0603 27.5,37.5 r90 top value=0R
R1 "ERP_101-1" RESC0603X03L 40,39.075 r90 top value=100k
R2 "ERP_101-1" RESC0603X03L 28.75,45 r90 top value=33R
R3 "ERP_101-1" RESC0603X03L 22.5,45 r270 top value=33R
R4 "ERP_101-1" RESC0603X03L 23.75,45 r90 top value=0R
R5 "ERP_101-1" RESC0603X03L 25,45 r90 top value=5M
R6 "ERP_101-1" RESC0603X03L 26.25,45 r90 top value=0R
R7 "ERP_101-1" RESC0603X03L 37.5,39.075 r270 top value=0R
R8 "ERP_101-1" RESC0603X03L 36.25,39.075 r270 top value=0R
TP1 "TP_0P8MM" TP_0P8MM#1 22.5,25 r90 bottom
TP2 "TP_0P8MM" TP_0P8MM#1 22.5,12.5 r90 bottom
TP3 "TP_0P8MM" TP_0P8MM#1 13.75,5 r180 bottom
TP4 "TP_0P8MM" TP_0P8MM#1 20,22.5 r90 bottom
TP5 "TP_0P8MM" TP_0P8MM#1 25,22.5 r90 bottom
TP6 "TP_0P8MM" TP_0P8MM#1 21.25,5 r180 bottom
TP7 "TP_0P8MM" TP_0P8MM#1 26.25,2.5 r90 bottom
TP8 "TP_0P8MM" TP_0P8MM#1 27.5,3.75 r90 bottom
TP9 "TP_0P8MM" TP_0P8MM#1 12.5,5 r90 bottom
TP10 "TP_0P8MM" TP_0P8MM#1 10,3.75 r90 bottom
TP11 "TP_0P8MM" TP_0P8MM#1 13.75,26.25 r90 bottom
TP12 "TP_0P8MM" TP_0P8MM#1 10,5 r90 bottom
TP13 "TP_0P8MM" TP_0P8MM#1 8.75,3.75 r90 bottom
TP14 "TP_0P8MM" TP_0P8MM#1 12.5,3.75 r90 bottom
TP15 "TP_0P8MM" TP_0P8MM#1 11.25,5 r180 bottom
TP16 "TP_0P8MM" TP_0P8MM#1 21.25,3.75 r90 bottom
TP17 "TP_0P8MM" TP_0P8MM#1 11.25,2.5 r90 bottom
TP18 "TP_0P8MM" TP_0P8MM#1 21.25,6.25 r90 bottom
TP19 "TP_0P8MM" TP_0P8MM#1 18.75,23.75 r90 bottom
TP20 "TP_0P8MM" TP_0P8MM#1 26.25,23.75 r90 bottom
TP21 "TP_0P8MM" TP_0P8MM#1 23.75,15 r90 bottom
TP22 "TP_0P8MM" TP_0P8MM#1 18.75,2.5 r90 bottom
TP23 "TP_0P8MM" TP_0P8MM#1 17.5,3.75 r90 bottom
TP24 "TP_0P8MM" TP_0P8MM#1 22.5,3.75 r90 bottom
TP25 "TP_0P8MM" TP_0P8MM#1 13.75,3.75 r90 bottom
TP26 "TP_0P8MM" TP_0P8MM#1 12.5,1.25 r90 bottom
TP27 "TP_0P8MM" TP_0P8MM#1 22.5,2.5 r90 bottom
TP28 "TP_0P8MM" TP_0P8MM#1 3.75,2.5 r90 bottom
TP29 "TP_0P8MM" TP_0P8MM#1 5,3.75 r90 bottom
TP30 "TP_0P8MM" TP_0P8MM#1 23.75,5 r90 bottom
TP31 "TP_0P8MM" TP_0P8MM#1 25,11.25 r90 bottom
TP32 "TP_0P8MM" TP_0P8MM#1 25,7.5 r90 bottom
TP33 "TP_0P8MM" TP_0P8MM#1 22.5,8.75 r90 bottom
TP34 "TP_0P8MM" TP_0P8MM#1 2.5,23.75 r90 bottom
TP35 "TP_0P8MM" TP_0P8MM#1 20,11.25 r90 bottom
TP36 "TP_0P8MM" TP_0P8MM#1 11.25,3.75 r90 bottom
TP37 "TP_0P8MM" TP_0P8MM#1 22.5,5 r90 bottom
TP38 "TP_0P8MM" TP_0P8MM#1 20,7.5 r90 bottom
TP39 "TP_0P8MM" TP_0P8MM#1 21.25,7.5 r90 bottom
TP40 "TP_0P8MM" TP_0P8MM#1 2.5,8.75 r90 bottom
TP41 "TP_0P8MM" TP_0P8MM#1 6.25,25 r90 bottom
TP42 "TP_0P8MM" TP_0P8MM#1 21.25,8.75 r90 bottom
TP43 "TP_0P8MM" TP_0P8MM#1 2.5,12.5 r90 bottom
TP44 "TP_0P8MM" TP_0P8MM#1 5,12.5 r90 bottom
TP45 "TP_0P8MM" TP_0P8MM#1 23.75,8.75 r90 bottom
TP46 "TP_0P8MM" TP_0P8MM#1 20,15 r90 bottom
TP47 "TP_0P8MM" TP_0P8MM#1 23.75,3.75 r90 bottom
TP48 "TP_0P8MM" TP_0P8MM#1 22.5,11.25 r90 bottom
TP49 "TP_0P8MM" TP_0P8MM#1 8.75,28.75 r90 bottom
TP50 "TP_0P8MM" TP_0P8MM#1 11.25,27.5 r90 bottom
TP51 "TP_0P8MM" TP_0P8MM#1 1.25,25 r90 bottom
TP52 "TP_0P8MM" TP_0P8MM#1 10,25 r90 bottom
TP53 "TP_0P8MM" TP_0P8MM#1 6.25,27.5 r90 bottom
TP54 "TP_0P8MM" TP_0P8MM#1 10,27.5 r90 bottom
TP55 "TP_0P8MM" TP_0P8MM#1 5,16.25 r90 bottom
TP56 "TP_0P8MM" TP_0P8MM#1 2.5,16.25 r90 bottom
TP57 "TP_0P8MM" TP_0P8MM#1 2.5,5 r90 bottom
TP58 "TP_0P8MM" TP_0P8MM#1 5,8.75 r90 bottom
TP59 "TP_0P8MM" TP_0P8MM#1 1.25,3.75 r90 bottom
TP60 "TP_0P8MM" TP_0P8MM#1 8.75,1.25 r270 bottom
TP61 "TP_0P8MM" TP_0P8MM#1 1.25,7.5 r270 bottom
TP62 "TP_0P8MM" TP_0P8MM#1 3.75,6.25 r270 bottom
TP63 "TP_0P8MM" TP_0P8MM#1 2.5,20 r270 bottom
TP64 "TP_0P8MM" TP_0P8MM#1 5,20 r270 bottom
TP65 "TP_0P8MM" TP_0P8MM#1 7.5,2.5 r270 bottom
TP66 "TP_0P8MM" TP_0P8MM#1 5,1.25 r270 bottom
TP67 "TP_0P8MM" TP_0P8MM#1 20,18.75 r90 bottom
TP68 "TP_0P8MM" TP_0P8MM#1 12.5,28.75 r270 bottom
TP69 "TP_0P8MM" TP_0P8MM#1 25,15 r90 bottom
TP70 "TP_0P8MM" TP_0P8MM#1 25,18.75 r90 bottom
TP71 "TP_0P8MM" TP_0P8MM#1 1.25,11.25 r90 bottom
TP72 "TP_0P8MM" TP_0P8MM#1 22.5,16.25 r90 bottom
TP73 "TP_0P8MM" TP_0P8MM#1 5,28.75 r90 bottom
TP74 "TP_0P8MM" TP_0P8MM#1 2.5,27.5 r90 bottom
TP75 "TP_0P8MM" TP_0P8MM#1 22.5,23.75 r90 bottom
TP76 "TP_0P8MM" TP_0P8MM#2 21.25,23.75 r0 top
TP77 "TP_0P8MM" TP_0P8MM#1 22.5,22.5 r90 bottom
TP78 "TP_0P8MM" TP_0P8MM#2 22.5,17.5 r180 top
TP79 "TP_0P8MM" TP_0P8MM#1 27.5,25 r90 bottom
TP80 "TP_0P8MM" TP_0P8MM#2 22.5,15 r0 top
TP81 "TP_0P8MM" TP_0P8MM#1 28.75,25 r90 bottom
TP82 "TP_0P8MM" TP_0P8MM#2 21.25,25 r0 top
TP83 "TP_0P8MM" TP_0P8MM#2 21.25,22.5 r0 top
TP84 "TP_0P8MM" TP_0P8MM#1 21.25,13.75 r90 bottom
TP85 "TP_0P8MM" TP_0P8MM#2 21.25,21.25 r0 top
TP86 "TP_0P8MM" TP_0P8MM#1 21.25,11.25 r90 bottom
TP87 "TP_0P8MM" TP_0P8MM#2 21.25,20 r0 top
TP88 "TP_0P8MM" TP_0P8MM#1 21.25,12.5 r90 bottom
TP89 "TP_0P8MM" TP_0P8MM#2 21.25,18.75 r0 top
TP90 "TP_0P8MM" TP_0P8MM#1 23.75,13.75 r90 bottom
TP91 "TP_0P8MM" TP_0P8MM#2 23.75,25 r0 top
TP92 "TP_0P8MM" TP_0P8MM#2 23.75,23.75 r0 top
TP93 "TP_0P8MM" TP_0P8MM#2 23.75,22.5 r0 top
TP94 "TP_0P8MM" TP_0P8MM#2 23.75,21.25 r0 top
TP95 "TP_0P8MM" TP_0P8MM#2 23.75,20 r0 top
TP96 "TP_0P8MM" TP_0P8MM#2 23.75,18.75 r0 top
TP97 "TP_0P8MM" TP_0P8MM#2 23.75,17.5 r0 top
TP98 "TP_0P8MM" TP_0P8MM#2 23.75,16.25 r0 top
TP99 "TP_0P8MM" TP_0P8MM#2 18.75,3.75 r90 top
TP100 "TP_0P8MM" TP_0P8MM#1 16.25,2.5 r270 bottom
TP101 "TP_0P8MM" TP_0P8MM#1 17.5,1.25 r270 bottom
TP102 "TP_0P8MM" TP_0P8MM#2 20,3.75 r270 top
TP103 "TP_0P8MM" TP_0P8MM#2 17.5,28.75 r270 top
TP104 "TP_0P8MM" TP_0P8MM#2 16.25,27.5 r270 top
TP105 "TP_0P8MM" TP_0P8MM#2 26.25,5 r270 top
TP106 "TP_0P8MM" TP_0P8MM#2 27.5,5 r270 top
TP107 "TP_0P8MM" TP_0P8MM#2 28.75,5 r270 top
TP108 "TP_0P8MM" TP_0P8MM#2 28.75,3.75 r270 top
TP109 "TP_0P8MM" TP_0P8MM#2 21.25,17.5 r0 top
TP110 "TP_0P8MM" TP_0P8MM#2 21.25,16.25 r180 top
TP111 "TP_0P8MM" TP_0P8MM#1 20,5 r90 bottom
TP112 "TP_0P8MM" TP_0P8MM#1 25,5 r90 bottom
TP113 "TP_0P8MM" TP_0P8MM#1 21.25,10 r90 bottom
TP114 "TP_0P8MM" TP_0P8MM#1 18.75,28.75 r90 bottom
TP115 "TP_0P8MM" TP_0P8MM#1 20,28.75 r90 bottom
TP116 "TP_0P8MM" TP_0P8MM#1 21.25,28.75 r90 bottom
TP117 "TP_0P8MM" TP_0P8MM#1 22.5,28.75 r90 bottom
TP118 "TP_0P8MM" TP_0P8MM#1 23.75,28.75 r90 bottom
TP119 "TP_0P8MM" TP_0P8MM#1 25,28.75 r90 bottom
TP120 "TP_0P8MM" TP_0P8MM#1 26.25,28.75 r90 bottom
TP121 "TP_0P8MM" TP_0P8MM#1 18.75,27.5 r90 bottom
TP122 "TP_0P8MM" TP_0P8MM#1 20,27.5 r90 bottom
TP123 "TP_0P8MM" TP_0P8MM#1 21.25,27.5 r90 bottom
TP124 "TP_0P8MM" TP_0P8MM#1 22.5,27.5 r90 bottom
TP125 "TP_0P8MM" TP_0P8MM#1 23.75,27.5 r90 bottom
TP126 "TP_0P8MM" TP_0P8MM#1 25,27.5 r90 bottom
TP127 "TP_0P8MM" TP_0P8MM#1 26.25,27.5 r90 bottom
TP128 "TP_0P8MM" TP_0P8MM#1 18.75,26.25 r90 bottom
TP129 "TP_0P8MM" TP_0P8MM#1 21.25,26.25 r90 bottom
TP130 "TP_0P8MM" TP_0P8MM#1 23.75,26.25 r90 bottom
TP131 "TP_0P8MM" TP_0P8MM#1 26.25,26.25 r90 bottom
TP132 "TP_0P8MM" TP_0P8MM#1 16.25,26.25 r90 bottom
TP133 "TP_0P8MM" TP_0P8MM#1 17.5,26.25 r90 bottom
TP134 "TP_0P8MM" TP_0P8MM#1 16.25,25 r90 bottom
TP135 "TP_0P8MM" TP_0P8MM#1 17.5,25 r90 bottom
TP136 "TP_0P8MM" TP_0P8MM#1 18.75,25 r90 bottom
TP137 "TP_0P8MM" TP_0P8MM#1 20,25 r90 bottom
TP138 "TP_0P8MM" TP_0P8MM#1 27.5,26.25 r90 bottom
TP139 "TP_0P8MM" TP_0P8MM#1 28.75,26.25 r90 bottom
TP140 "TP_0P8MM" TP_0P8MM#1 28.75,27.5 r90 bottom
TP141 "TP_0P8MM" TP_0P8MM#1 27.5,28.75 r90 bottom
TP142 "TP_0P8MM" TP_0P8MM#1 22.5,26.25 r90 bottom
TP143 "TP_0P8MM" TP_0P8MM#1 20,26.25 r90 bottom
TP144 "TP_0P8MM" TP_0P8MM#1 27.5,27.5 r90 bottom
TP145 "TP_0P8MM" TP_0P8MM#1 23.75,12.5 r90 bottom
TP146 "TP_0P8MM" TP_0P8MM#1 23.75,11.25 r90 bottom
TP147 "TP_0P8MM" TP_0P8MM#1 25,2.5 r90 bottom
TP148 "TP_0P8MM" TP_0P8MM#1 25,1.25 r90 bottom
TP149 "TP_0P8MM" TP_0P8MM#1 22.5,10 r90 bottom
TP150 "TP_0P8MM" TP_0P8MM#1 23.75,10 r90 bottom
TP151 "TP_0P8MM" TP_0P8MM#1 17.5,5 r90 bottom
TP152 "TP_0P8MM" TP_0P8MM#1 16.25,5 r90 bottom
TP153 "TP_0P8MM" TP_0P8MM#1 16.25,3.75 r90 bottom
TP154 "TP_0P8MM" TP_0P8MM#1 2.5,13.75 r90 bottom
TP155 "TP_0P8MM" TP_0P8MM#1 2.5,3.75 r90 bottom
TP156 "TP_0P8MM" TP_0P8MM#1 20,12.5 r90 bottom
TP157 "TP_0P8MM" TP_0P8MM#1 3.75,5 r90 bottom
TP158 "TP_0P8MM" TP_0P8MM#1 6.25,26.25 r90 bottom
TP159 "TP_0P8MM" TP_0P8MM#1 26.25,1.25 r90 bottom
TP160 "TP_0P8MM" TP_0P8MM#1 27.5,1.25 r90 bottom
TP161 "TP_0P8MM" TP_0P8MM#1 27.5,2.5 r90 bottom
TP162 "TP_0P8MM" TP_0P8MM#1 28.75,2.5 r90 bottom
TP163 "TP_0P8MM" TP_0P8MM#1 17.5,2.5 r90 bottom
TP164 "TP_0P8MM" TP_0P8MM#1 18.75,1.25 r90 bottom
TP165 "TP_0P8MM" TP_0P8MM#1 20,1.25 r90 bottom
TP166 "TP_0P8MM" TP_0P8MM#1 13.75,27.5 r90 bottom
TP167 "TP_0P8MM" TP_0P8MM#1 13.75,25 r90 bottom
TP168 "TP_0P8MM" TP_0P8MM#1 20,2.5 r90 bottom
TP169 "TP_0P8MM" TP_0P8MM#1 12.5,27.5 r90 bottom
TP170 "TP_0P8MM" TP_0P8MM#1 12.5,26.25 r90 bottom
TP171 "TP_0P8MM" TP_0P8MM#1 12.5,25 r90 bottom
TP172 "TP_0P8MM" TP_0P8MM#1 11.25,28.75 r90 bottom
TP173 "TP_0P8MM" TP_0P8MM#1 11.25,26.25 r90 bottom
TP174 "TP_0P8MM" TP_0P8MM#1 11.25,25 r90 bottom
TP175 "TP_0P8MM" TP_0P8MM#1 10,28.75 r90 bottom
TP176 "TP_0P8MM" TP_0P8MM#1 10,26.25 r90 bottom
TP177 "TP_0P8MM" TP_0P8MM#1 3.75,25 r90 bottom
TP178 "TP_0P8MM" TP_0P8MM#1 5,25 r90 bottom
TP179 "TP_0P8MM" TP_0P8MM#1 3.75,23.75 r90 bottom
TP180 "TP_0P8MM" TP_0P8MM#1 5,23.75 r90 bottom
TP181 "TP_0P8MM" TP_0P8MM#1 3.75,22.5 r90 bottom
TP182 "TP_0P8MM" TP_0P8MM#1 1.25,27.5 r90 bottom
TP183 "TP_0P8MM" TP_0P8MM#1 12.5,2.5 r90 bottom
TP184 "TP_0P8MM" TP_0P8MM#1 1.25,26.25 r90 bottom
TP185 "TP_0P8MM" TP_0P8MM#1 13.75,2.5 r90 bottom
TP186 "TP_0P8MM" TP_0P8MM#1 3.75,28.75 r90 bottom
TP187 "TP_0P8MM" TP_0P8MM#1 10,1.25 r90 bottom
TP188 "TP_0P8MM" TP_0P8MM#1 2.5,28.75 r90 bottom
TP189 "TP_0P8MM" TP_0P8MM#1 11.25,1.25 r90 bottom
TP190 "TP_0P8MM" TP_0P8MM#1 7.5,28.75 r90 bottom
TP191 "TP_0P8MM" TP_0P8MM#1 6.25,1.25 r90 bottom
TP192 "TP_0P8MM" TP_0P8MM#1 6.25,28.75 r90 bottom
TP193 "TP_0P8MM" TP_0P8MM#1 7.5,1.25 r90 bottom
TP194 "TP_0P8MM" TP_0P8MM#1 8.75,27.5 r90 bottom
TP195 "TP_0P8MM" TP_0P8MM#1 5,2.5 r90 bottom
TP196 "TP_0P8MM" TP_0P8MM#1 7.5,27.5 r90 bottom
TP197 "TP_0P8MM" TP_0P8MM#1 6.25,2.5 r90 bottom
TP198 "TP_0P8MM" TP_0P8MM#1 5,27.5 r90 bottom
TP199 "TP_0P8MM" TP_0P8MM#1 8.75,2.5 r90 bottom
TP200 "TP_0P8MM" TP_0P8MM#1 3.75,27.5 r90 bottom
TP201 "TP_0P8MM" TP_0P8MM#1 10,2.5 r90 bottom
TP202 "TP_0P8MM" TP_0P8MM#1 5,26.25 r90 bottom
TP203 "TP_0P8MM" TP_0P8MM#1 3.75,3.75 r90 bottom
TP204 "TP_0P8MM" TP_0P8MM#1 3.75,26.25 r90 bottom
TP205 "TP_0P8MM" TP_0P8MM#1 2.5,26.25 r90 bottom
TP206 "TP_0P8MM" TP_0P8MM#1 20,23.75 r90 bottom
TP207 "TP_0P8MM" TP_0P8MM#1 18.75,22.5 r90 bottom
TP208 "TP_0P8MM" TP_0P8MM#1 18.75,21.25 r90 bottom
TP209 "TP_0P8MM" TP_0P8MM#1 20,21.25 r90 bottom
TP210 "TP_0P8MM" TP_0P8MM#1 18.75,20 r90 bottom
TP211 "TP_0P8MM" TP_0P8MM#1 20,20 r90 bottom
TP212 "TP_0P8MM" TP_0P8MM#1 18.75,18.75 r90 bottom
TP213 "TP_0P8MM" TP_0P8MM#1 18.75,17.5 r90 bottom
TP214 "TP_0P8MM" TP_0P8MM#1 20,17.5 r90 bottom
TP215 "TP_0P8MM" TP_0P8MM#1 18.75,16.25 r90 bottom
TP216 "TP_0P8MM" TP_0P8MM#1 20,16.25 r90 bottom
TP217 "TP_0P8MM" TP_0P8MM#1 18.75,15 r90 bottom
TP218 "TP_0P8MM" TP_0P8MM#1 21.25,15 r90 bottom
TP219 "TP_0P8MM" TP_0P8MM#1 18.75,13.75 r90 bottom
TP220 "TP_0P8MM" TP_0P8MM#1 20,13.75 r90 bottom
TP221 "TP_0P8MM" TP_0P8MM#1 18.75,12.5 r90 bottom
TP222 "TP_0P8MM" TP_0P8MM#1 18.75,11.25 r90 bottom
TP223 "TP_0P8MM" TP_0P8MM#1 18.75,10 r90 bottom
TP224 "TP_0P8MM" TP_0P8MM#1 20,10 r90 bottom
TP225 "TP_0P8MM" TP_0P8MM#1 2.5,25 r90 bottom
TP226 "TP_0P8MM" TP_0P8MM#1 1.25,23.75 r90 bottom
TP227 "TP_0P8MM" TP_0P8MM#1 1.25,22.5 r90 bottom
TP228 "TP_0P8MM" TP_0P8MM#1 2.5,22.5 r90 bottom
TP229 "TP_0P8MM" TP_0P8MM#1 1.25,21.25 r90 bottom
TP230 "TP_0P8MM" TP_0P8MM#1 2.5,21.25 r90 bottom
TP231 "TP_0P8MM" TP_0P8MM#1 1.25,20 r90 bottom
TP232 "TP_0P8MM" TP_0P8MM#1 1.25,18.75 r90 bottom
TP233 "TP_0P8MM" TP_0P8MM#1 2.5,18.75 r90 bottom
TP234 "TP_0P8MM" TP_0P8MM#1 1.25,17.5 r90 bottom
TP235 "TP_0P8MM" TP_0P8MM#1 2.5,17.5 r90 bottom
TP236 "TP_0P8MM" TP_0P8MM#1 1.25,16.25 r90 bottom
TP237 "TP_0P8MM" TP_0P8MM#1 1.25,15 r90 bottom
TP238 "TP_0P8MM" TP_0P8MM#1 2.5,15 r90 bottom
TP239 "TP_0P8MM" TP_0P8MM#1 1.25,13.75 r90 bottom
TP240 "TP_0P8MM" TP_0P8MM#1 1.25,12.5 r90 bottom
TP241 "TP_0P8MM" TP_0P8MM#1 8.75,26.25 r90 bottom
TP242 "TP_0P8MM" TP_0P8MM#1 7.5,26.25 r90 bottom
TP243 "TP_0P8MM" TP_0P8MM#1 7.5,25 r90 bottom
TP244 "TP_0P8MM" TP_0P8MM#1 8.75,25 r90 bottom
TP245 "TP_0P8MM" TP_0P8MM#1 5,22.5 r90 bottom
TP246 "TP_0P8MM" TP_0P8MM#1 3.75,21.25 r90 bottom
TP247 "TP_0P8MM" TP_0P8MM#1 5,21.25 r90 bottom
TP248 "TP_0P8MM" TP_0P8MM#1 3.75,20 r90 bottom
TP249 "TP_0P8MM" TP_0P8MM#1 3.75,18.75 r90 bottom
TP250 "TP_0P8MM" TP_0P8MM#1 5,18.75 r90 bottom
TP251 "TP_0P8MM" TP_0P8MM#1 3.75,17.5 r90 bottom
TP252 "TP_0P8MM" TP_0P8MM#1 5,17.5 r90 bottom
TP253 "TP_0P8MM" TP_0P8MM#1 3.75,16.25 r90 bottom
TP254 "TP_0P8MM" TP_0P8MM#1 3.75,15 r90 bottom
TP255 "TP_0P8MM" TP_0P8MM#1 5,15 r90 bottom
TP256 "TP_0P8MM" TP_0P8MM#1 3.75,13.75 r90 bottom
TP257 "TP_0P8MM" TP_0P8MM#1 5,13.75 r90 bottom
TP258 "TP_0P8MM" TP_0P8MM#1 3.75,12.5 r90 bottom
TP259 "TP_0P8MM" TP_0P8MM#1 3.75,11.25 r90 bottom
TP260 "TP_0P8MM" TP_0P8MM#1 5,11.25 r90 bottom
TP261 "TP_0P8MM" TP_0P8MM#1 3.75,10 r90 bottom
TP262 "TP_0P8MM" TP_0P8MM#1 5,10 r90 bottom
TP263 "TP_0P8MM" TP_0P8MM#1 3.75,8.75 r90 bottom
TP264 "TP_0P8MM" TP_0P8MM#1 3.75,7.5 r90 bottom
TP265 "TP_0P8MM" TP_0P8MM#1 5,7.5 r90 bottom
TP266 "TP_0P8MM" TP_0P8MM#1 5,6.25 r90 bottom
TP267 "TP_0P8MM" TP_0P8MM#1 5,5 r90 bottom
TP268 "TP_0P8MM" TP_0P8MM#1 6.25,5 r90 bottom
TP269 "TP_0P8MM" TP_0P8MM#1 6.25,3.75 r90 bottom
TP270 "TP_0P8MM" TP_0P8MM#1 7.5,5 r90 bottom
TP271 "TP_0P8MM" TP_0P8MM#1 7.5,3.75 r90 bottom
TP272 "TP_0P8MM" TP_0P8MM#1 8.75,5 r90 bottom
TP273 "TP_0P8MM" TP_0P8MM#1 2.5,11.25 r90 bottom
TP274 "TP_0P8MM" TP_0P8MM#1 1.25,10 r90 bottom
TP275 "TP_0P8MM" TP_0P8MM#1 2.5,10 r90 bottom
TP276 "TP_0P8MM" TP_0P8MM#1 1.25,8.75 r90 bottom
TP277 "TP_0P8MM" TP_0P8MM#1 2.5,7.5 r90 bottom
TP278 "TP_0P8MM" TP_0P8MM#1 1.25,6.25 r90 bottom
TP279 "TP_0P8MM" TP_0P8MM#1 1.25,5 r90 bottom
TP280 "TP_0P8MM" TP_0P8MM#1 2.5,6.25 r90 bottom
TP281 "TP_0P8MM" TP_0P8MM#1 2.5,1.25 r90 bottom
TP282 "TP_0P8MM" TP_0P8MM#1 2.5,2.5 r90 bottom
TP283 "TP_0P8MM" TP_0P8MM#1 1.25,2.5 r90 bottom
TP284 "TP_0P8MM" TP_0P8MM#1 3.75,1.25 r90 bottom
TP285 "TP_0P8MM" TP_0P8MM#1 20,6.25 r90 bottom
TP286 "TP_0P8MM" TP_0P8MM#1 18.75,8.75 r180 bottom
TP287 "TP_0P8MM" TP_0P8MM#1 26.25,3.75 r90 bottom
TP288 "TP_0P8MM" TP_0P8MM#1 20,8.75 r90 bottom
TP289 "TP_0P8MM" TP_0P8MM#1 18.75,7.5 r180 bottom
TP290 "TP_0P8MM" TP_0P8MM#1 25,3.75 r90 bottom
TP291 "TP_0P8MM" TP_0P8MM#1 23.75,2.5 r90 bottom
TP292 "TP_0P8MM" TP_0P8MM#1 23.75,1.25 r90 bottom
TP293 "TP_0P8MM" TP_0P8MM#1 25,20 r90 bottom
TP294 "TP_0P8MM" TP_0P8MM#1 25,21.25 r90 bottom
TP295 "TP_0P8MM" TP_0P8MM#1 25,23.75 r90 bottom
TP296 "TP_0P8MM" TP_0P8MM#1 25,25 r90 bottom
TP297 "TP_0P8MM" TP_0P8MM#1 26.25,20 r90 bottom
TP298 "TP_0P8MM" TP_0P8MM#1 25,17.5 r90 bottom
TP299 "TP_0P8MM" TP_0P8MM#1 25,16.25 r90 bottom
TP300 "TP_0P8MM" TP_0P8MM#1 26.25,15 r90 bottom
TP301 "TP_0P8MM" TP_0P8MM#1 26.25,13.75 r90 bottom
TP302 "TP_0P8MM" TP_0P8MM#1 26.25,12.5 r90 bottom
TP303 "TP_0P8MM" TP_0P8MM#1 25,8.75 r90 bottom
TP304 "TP_0P8MM" TP_0P8MM#1 25,10 r90 bottom
TP305 "TP_0P8MM" TP_0P8MM#1 26.25,10 r90 bottom
TP306 "TP_0P8MM" TP_0P8MM#1 26.25,21.25 r90 bottom
TP307 "TP_0P8MM" TP_0P8MM#1 26.25,22.5 r90 bottom
TP308 "TP_0P8MM" TP_0P8MM#1 26.25,25 r90 bottom
TP309 "TP_0P8MM" TP_0P8MM#1 25,26.25 r90 bottom
TP310 "TP_0P8MM" TP_0P8MM#1 26.25,18.75 r90 bottom
TP311 "TP_0P8MM" TP_0P8MM#1 26.25,17.5 r90 bottom
TP312 "TP_0P8MM" TP_0P8MM#1 26.25,16.25 r90 bottom
TP313 "TP_0P8MM" TP_0P8MM#1 25,13.75 r90 bottom
TP314 "TP_0P8MM" TP_0P8MM#1 25,12.5 r90 bottom
TP315 "TP_0P8MM" TP_0P8MM#1 26.25,11.25 r90 bottom
TP316 "TP_0P8MM" TP_0P8MM#1 26.25,8.75 r90 bottom
TP317 "TP_0P8MM" TP_0P8MM#1 18.75,6.25 r180 bottom
TP318 "TP_0P8MM" TP_0P8MM#1 18.75,5 r180 bottom
TP319 "TP_0P8MM" TP_0P8MM#2 22.5,1.25 r90 top
TP320 "TP_0P8MM" TP_0P8MM#1 21.25,2.5 r90 bottom
TP321 "TP_0P8MM" TP_0P8MM#1 21.25,1.25 r90 bottom
TP322 "TP_0P8MM" TP_0P8MM#1 22.5,7.5 r90 bottom
TP323 "TP_0P8MM" TP_0P8MM#1 22.5,6.25 r90 bottom
TP324 "TP_0P8MM" TP_0P8MM#1 23.75,7.5 r90 bottom
TP325 "TP_0P8MM" TP_0P8MM#1 23.75,6.25 r90 bottom
TP326 "TP_0P8MM" TP_0P8MM#1 25,6.25 r90 bottom
TP327 "TP_0P8MM" TP_0P8MM#1 26.25,7.5 r90 bottom
TP328 "TP_0P8MM" TP_0P8MM#1 26.25,6.25 r90 bottom
TP329 "TP_0P8MM" TP_0P8MM#1 22.5,21.25 r90 bottom
TP330 "TP_0P8MM" TP_0P8MM#1 22.5,20 r90 bottom
TP331 "TP_0P8MM" TP_0P8MM#1 22.5,18.75 r90 bottom
TP334 "TP_0P8MM" TP_0P8MM#1 22.5,13.75 r90 bottom
U1 "APX803L" APX803L 31,38.4 r0 top
U2 "ERP_121-4" QFN40P700X700X106_HS-57N 11.634,14.773 r225 top value=ESP32-S3-PICO-1
X1 "ERP_111-1" CRYS_L1.6_W1 23.2,42.5 r0 top value=32.768Khz

## Footprints (in the part's own frame and the unit in brackets; to place one, negate y for a bottom-side part, rotate by r counter-clockwise, add the part's x,y. Pads: shape width x height; smd on the part's side, far side on the other; paste and mask are expansions set on the pad)
APX803L [mm] "SOT23, 3-Leads, Body 2.90x2.40mm, Pitch 0.90mm, IPC Medium Density"
  rect 0.9x0.8 smd: 1(-1,0.9) 2(-1,-0.9) 3(1,0)
  silkscreen extent -1.12,-1.5 0.7,1.97, body extent -1.25,-1.5 1.25,1.5, height 1.1
CAPC0603X03L [mm] "Chip Capacitor, 2-Leads, Body 0.60x0.30mm, IPC High Density"
  rect 0.3x0.3 smd: 1(-0.3,0) 2(0.3,0)
  body extent -0.32,-0.17 0.32,0.17, height 0.3
CRYS_L1.6_W1 [mm]
  rect 0.5x1 smd: 1(-0.55,0) 2(0.55,0)
  body extent -0.8,-0.5 0.8,0.5, height 0.51
IND_0603 [mm]
  rect 1x0.97 smd: 1(-0.735,0) 2(0.735,0)
  silkscreen extent -1.5,-0.75 1.5,0.75, body extent -0.8,-0.4 0.8,0.4, height 1
INDC0603X03L [mm] "Chip Inductor, 2-Leads, Body 0.60x0.30mm, IPC High Density"
  rect 0.275x0.3 smd: 1(-0.262,0) 2(0.263,0)
  body extent -0.32,-0.17 0.32,0.17, height 0.3
QFN40P700X700X106_HS-57N [mm] "QFN, 56-Leads, Body 7.00x7.00mm, Pitch 0.40mm, Thermal Pad 4.00x4.00mm, IPC Medium Density"
  rect 0.85x0.2 smd: 1(-3.425,2.6) 2(-3.425,2.2) 3(-3.425,1.8) 4(-3.425,1.4) 5(-3.425,1) 6(-3.425,0.6) 7(-3.425,0.2) 8(-3.425,-0.2) 9(-3.425,-0.6) 10(-3.425,-1) 11(-3.425,-1.4) 12(-3.425,-1.8) 13(-3.425,-2.2) 14(-3.425,-2.6) 29(3.425,-2.6) 30(3.425,-2.2) 31(3.425,-1.8) 32(3.425,-1.4) 33(3.425,-1) 34(3.425,-0.6) 35(3.425,-0.2) 36(3.425,0.2) 37(3.425,0.6) 38(3.425,1) 39(3.425,1.4) 40(3.425,1.8) 41(3.425,2.2) 42(3.425,2.6)
  rect 0.2x0.85 smd: 15(-2.6,-3.425) 16(-2.2,-3.425) 17(-1.8,-3.425) 18(-1.4,-3.425) 19(-1,-3.425) 20(-0.6,-3.425) 21(-0.2,-3.425) 22(0.2,-3.425) 23(0.6,-3.425) 24(1,-3.425) 25(1.4,-3.425) 26(1.8,-3.425) 27(2.2,-3.425) 28(2.6,-3.425) 43(2.6,3.425) 44(2.2,3.425) 45(1.8,3.425) 46(1.4,3.425) 47(1,3.425) 48(0.6,3.425) 49(0.2,3.425) 50(-0.2,3.425) 51(-0.6,3.425) 52(-1,3.425) 53(-1.4,3.425) 54(-1.8,3.425) 55(-2.2,3.425) 56(-2.6,3.425)
  rect 4x4 smd: 57(0,0)
  silkscreen extent -4.47,-3.7 3.7,3.7, body extent -3.54,-3.53 3.51,3.52, height 0.89
RESC0603X03L [mm] "Chip Resistor, 2-Leads, Body 0.60x0.30mm, IPC High Density"
  rect 0.35x0.4 smd: 1(-0.325,0) 2(0.325,0)
  body extent -0.32,-0.17 0.32,0.17, height 0.26
TP_0P8MM#1 [mm]
  round 0.8 smd mask+0: 1(0,0)
TP_0P8MM#2 [mm]
  round 0.8 smd far side mask+0: 1(0,0)
uFL_50R [mm]
  rect 1x1.05 smd: 1(0,-0.763)
  rect 1.05x2.2 smd: 2(-1.475,0.763) 3(1.475,0.763)
  silkscreen extent -1.3,-0.66 1.3,2.18, body extent -1.5,-0.79 1.5,2.31, height 1.3

## Part data
C1 C2 C3 C4 C5 C6 C7 C8 C9 C10 C11 C12 C13 C14: library part MLCC_0201, "Chip Capacitor, 2-Leads, Body 0.60x0.30mm, IPC High Density", Package=0201
FB1: library part FB_0201, "FERRITE BEAD 0201", Package=0201
J1: library part uFL_50R, "uFL_50R", Package=UMCC
L1: library part IND_0603, "IND_0603", Package=0603
R1 R2 R3 R4 R5 R6 R7 R8: library part RES_0201, "RES_0201", Package=0201
TP1 TP2 TP3 TP4 TP5 TP6 TP7 TP8 TP9 TP10 TP11 TP12 TP13 TP14 TP15 TP16 TP17 TP18 TP19 TP20 TP21 TP22 TP23 TP24 TP25 TP26 TP27 TP28 TP29 TP30 TP31 TP32 TP33 TP34 TP35 TP36 TP37 TP38 TP39 TP40 TP41 TP42 TP43 TP44 TP45 TP46 TP47 TP48 TP49 TP50 TP51 TP52 TP53 TP54 TP55 TP56 TP57 TP58 TP59 TP60 TP61 TP62 TP63 TP64 TP65 TP66 TP67 TP68 TP69 TP70 TP71 TP72 TP73 TP74 TP75 TP76 TP77 TP78 TP79 TP80 TP81 TP82 TP83 TP84 TP85 TP86 TP87 TP88 TP89 TP90 TP91 TP92 TP93 TP94 TP95 TP96 TP97 TP98 TP99 TP100 TP101 TP102 TP103 TP104 TP105 TP106 TP107 TP108 TP109 TP110 TP111 TP112 TP113 TP114 TP115 TP116 TP117 TP118 TP119 TP120 TP121 TP122 TP123 TP124 TP125 TP126 TP127 TP128 TP129 TP130 TP131 TP132 TP133 TP134 TP135 TP136 TP137 TP138 TP139 TP140 TP141 TP142 TP143 TP144 TP145 TP146 TP147 TP148 TP149 TP150 TP151 TP152 TP153 TP154 TP155 TP156 TP157 TP158 TP159 TP160 TP161 TP162 TP163 TP164 TP165 TP166 TP167 TP168 TP169 TP170 TP171 TP172 TP173 TP174 TP175 TP176 TP177 TP178 TP179 TP180 TP181 TP182 TP183 TP184 TP185 TP186 TP187 TP188 TP189 TP190 TP191 TP192 TP193 TP194 TP195 TP196 TP197 TP198 TP199 TP200 TP201 TP202 TP203 TP204 TP205 TP206 TP207 TP208 TP209 TP210 TP211 TP212 TP213 TP214 TP215 TP216 TP217 TP218 TP219 TP220 TP221 TP222 TP223 TP224 TP225 TP226 TP227 TP228 TP229 TP230 TP231 TP232 TP233 TP234 TP235 TP236 TP237 TP238 TP239 TP240 TP241 TP242 TP243 TP244 TP245 TP246 TP247 TP248 TP249 TP250 TP251 TP252 TP253 TP254 TP255 TP256 TP257 TP258 TP259 TP260 TP261 TP262 TP263 TP264 TP265 TP266 TP267 TP268 TP269 TP270 TP271 TP272 TP273 TP274 TP275 TP276 TP277 TP278 TP279 TP280 TP281 TP282 TP283 TP284 TP285 TP286 TP287 TP288 TP289 TP290 TP291 TP292 TP293 TP294 TP295 TP296 TP297 TP298 TP299 TP300 TP301 TP302 TP303 TP304 TP305 TP306 TP307 TP308 TP309 TP310 TP311 TP312 TP313 TP314 TP315 TP316 TP317 TP318 TP319 TP320 TP321 TP322 TP323 TP324 TP325 TP326 TP327 TP328 TP329 TP330 TP331 TP334: "OSM Footprint 0P8 LGA Ball"
U1: "IC SUPERVISOR 1 CHANNEL SOT23", Manufacturer 1="Diodes Incorporated", Manufacturer Part Number 1=APX803L20-33SA-7
U2: library part ESP32-S3-PICO-1, "RF TXRX MOD BLUETOOTH WIFISMD", Manufacturer 1="Espressif Systems", Package=56-TFQFN
X1: library part CRYS_L1.6_W1, "CRYSTAL 1P6XW1P0", Manufacturer 1="ECS Inc.", Manufacturer Part Number 1=ECS-.327-6-16R-TR, Package=1P6_1P0

## Via types
v1: diameter 0.508, hole 0.254, L1 to L4, 57 vias
v2: diameter 0.381, hole 0.254, L1 to L4, tented both sides, 1 vias

## Nets (pads, with @x,y where several pads share a name; then routed paths per layer and width w, separated by ;. In a path a pad name is that pad's centre, name@x,y a point inside that pad or via, vN(x,y) a via of type N, cw(c..) or ccw(c..) an arc to the next point about the centre after c; other vN are vias at no path point)
3V3_ESP: C5.1 C6.1 C7.1 C8.1 C12.1 C13.1 C14.1 FB1.1 R1.2 U1.3 U2.2 U2.3 U2.46
3V3A_ESP: C9.1 FB1.2 U2.55 U2.56
ADC_1: TP334.1
CAN_A_N: TP320.1
CAN_A_P: TP321.1
CARR_PWR_EN: TP39.1
COMM_ARR01: TP114.1
COMM_ARR02: TP115.1
COMM_ARR03: TP116.1
COMM_ARR04: TP117.1
COMM_ARR05: TP118.1
COMM_ARR06: TP119.1
COMM_ARR07: TP120.1
COMM_ARR08: TP121.1
COMM_ARR09: TP122.1
COMM_ARR10: TP123.1
COMM_ARR11: TP124.1
COMM_ARR12: TP125.1
COMM_ARR13: TP126.1
COMM_ARR14: TP127.1
COMM_ARR15: TP128.1
COMM_ARR16: TP129.1
COMM_ARR17: TP130.1
COMM_ARR18: TP131.1
CSI_CLOCK_N: TP200.1
CSI_CLOCK_P: TP198.1
CSI_DATA0_N: TP184.1
CSI_DATA0_P: TP182.1
CSI_DATA1_N: TP188.1
CSI_DATA1_P: TP186.1
CSI_DATA2_N: TP192.1
CSI_DATA2_P: TP190.1
CSI_DATA3_N: TP196.1
CSI_DATA3_P: TP194.1
CSI_MCK: TP205.1
CSI_TX_N: TP204.1
CSI_TX_P: TP202.1
DEBUG_EN: TP319.1
DSI_CLOCK_N: TP201.1
DSI_CLOCK_P: TP199.1
DSI_DATA0_N: TP185.1
DSI_DATA0_P: TP183.1
DSI_DATA1_N: TP189.1
DSI_DATA1_P: TP187.1
DSI_DATA2_N: TP193.1
DSI_DATA2_P: TP191.1
DSI_DATA3_N: TP197.1
DSI_DATA3_P: TP195.1
DSI_TE: TP203.1
EN: R1.1 U1.2 U2.4
ETH_A_CLK: TP212.1
ETH_A_COL: TP207.1
ETH_A_CRS: TP206.1
ETH_A_IOPWR: TP218.1
ETH_A_MDC: TP224.1
ETH_A_MDIO: TP223.1
ETH_A_RXCLK: TP222.1
ETH_A_RXD0: TP213.1
ETH_A_RXD1: TP215.1
ETH_A_RXD2: TP219.1
ETH_A_RXD3: TP221.1
ETH_A_RXDV: TP217.1
ETH_A_RXER: TP216.1
ETH_A_SDP: TP220.1
ETH_A_TXD0: TP210.1
ETH_A_TXD1: TP208.1
ETH_A_TXD2: TP211.1
ETH_A_TXD3: TP209.1
ETH_A_TXER: TP214.1
ETH_B_COL: TP226.1
ETH_B_CRS: TP225.1
ETH_B_MDC: TP242.1
ETH_B_MDIO: TP241.1
ETH_B_RXCLK: TP240.1
ETH_B_RXD0: TP232.1
ETH_B_RXD1: TP234.1
ETH_B_RXD2: TP237.1
ETH_B_RXD3: TP239.1
ETH_B_RXDV: TP236.1
ETH_B_RXER: TP235.1
ETH_B_SDP: TP238.1
ETH_B_TXCLK: TP231.1
ETH_B_TXD0: TP229.1
ETH_B_TXD1: TP227.1
ETH_B_TXD2: TP230.1
ETH_B_TXD3: TP228.1
ETH_B_TXER: TP233.1
GND: C1.2 C2.2 C3.2 C4.2 C5.2 C6.2 C7.2 C8.2 C9.2 C10.2 C11.2 C12.2 C13.2 C14.2 J1.2 J1.3 TP1.1 TP2.1 TP4.1 TP5.1 TP7.1 TP8.1 TP10.1 TP11.1 TP13.1 TP14.1 TP16.1 TP17.1 TP19.1 TP20.1 TP22.1 TP23.1 TP25.1 TP26.1 TP28.1 TP29.1 TP31.1 TP32.1 TP34.1 TP35.1 TP37.1 TP38.1 TP40.1 TP41.1 TP43.1 TP44.1 TP46.1 TP47.1 TP49.1 TP50.1 TP51.1 TP52.1 TP53.1 TP54.1 TP55.1 TP56.1 TP57.1 TP58.1 TP59.1 TP60.1 TP61.1 TP62.1 TP63.1 TP64.1 TP65.1 TP66.1 TP67.1 TP68.1 TP69.1 TP70.1 TP71.1 TP72.1 TP73.1 TP74.1 U1.1 U2.57
  other v1: 5,1.25 8.75,1.25 12.5,1.25 3.75,2.5 7.5,2.5 11.25,2.5 18.75,2.5 26.25,2.5 1.25,3.75 5,3.75 8.75,3.75 10,3.75 12.5,3.75 13.75,3.75 17.5,3.75 21.25,3.75 23.75,3.75 27.5,3.75 2.5,5 22.5,5 3.75,6.25 1.25,7.5 20,7.5 25,7.5 2.5,8.75 5,8.75 1.25,11.25 20,11.25 25,11.25 2.5,12.5 5,12.5 22.5,12.5 20,15 25,15 2.5,16.25 5,16.25 22.5,16.25 20,18.75 25,18.75 2.5,20 5,20 20,22.5 25,22.5 2.5,23.75 18.75,23.75 26.25,23.75 1.25,25 6.25,25 10,25 22.5,25 13.75,26.25 6.25,27.5 10,27.5 11.25,27.5 5,28.75 8.75,28.75 12.5,28.75
  other v2: 2.5,27.5
I2S_A_DIN: TP327.1
I2S_A_DOUT: TP328.1
I2S_B_DIN: TP324.1
I2S_B_DOUT: TP325.1
I2S_BITCLK: TP326.1
I2S_LRCLK: TP323.1
I2S_MCLK: TP322.1
IO0: TP45.1 U2.5
IO1: TP80.1 U2.6
IO2: TP82.1 U2.7
IO3: TP76.1 U2.8
IO4: TP83.1 U2.9
IO5: TP85.1 U2.10
IO6: TP87.1 U2.11
IO7: TP89.1 U2.12
IO8: TP91.1 U2.13
IO9: TP92.1 U2.14
IO10: TP93.1 U2.15
IO11: TP94.1 U2.16
IO12: TP95.1 U2.17
IO13: TP96.1 U2.18
IO14: TP97.1 U2.19
IO17: TP98.1 U2.23
IO18: TP99.1 U2.24
IO19: R7.1 U2.25
IO20: R8.1 U2.26
IO21: TP102.1 U2.27
IO33: TP105.1 U2.38
IO34: TP106.1 U2.39
IO35: TP107.1 U2.40
IO36: TP108.1 U2.41
IO37: TP109.1 U2.42
IO38: TP110.1 U2.43
IO45: TP78.1 U2.51
IO46: TP48.1 U2.52
IO47: TP104.1 U2.37
IO48: TP103.1 U2.36
JTCK: TP84.1 U2.44
JTDI: TP88.1 U2.47
JTDO: TP86.1 U2.45
JTMS: TP90.1 U2.48
LNA_IN: C1.1 L1.1 U2.1
N_FRC_RECV: TP113.1
N_PWR_BTN: TP36.1
N_SYS_RST: TP42.1
NC1: TP132.1
NC2: TP133.1
NC3: TP134.1
NC4: TP135.1
NC5: TP136.1
NC6: TP137.1
NC7: TP138.1
NC8: TP139.1
NC9: TP140.1
NC10: TP141.1
NC11: TP145.1
NC12: TP146.1
NC13: TP147.1
NC14: TP148.1
NC15: TP159.1
NC16: TP160.1
NC17: TP161.1
NC18: TP162.1
NC19: TP163.1
NC20: TP164.1
NC21: TP165.1
NC22: TP166.1
NC23: TP167.1
NC24: TP169.1
NC25: TP170.1
NC26: TP171.1
NC27: TP172.1
NC28: TP173.1
NC29: TP174.1
NC30: TP175.1
NC31: TP176.1
NC32: TP177.1
NC33: TP178.1
NC34: TP179.1
NC35: TP180.1
NC36: TP181.1
NC37: TP245.1
NC38: TP246.1
NC39: TP247.1
NC40: TP285.1
NC41: TP286.1
NC42: TP287.1
NC43: TP288.1
NC44: TP289.1
NC45: TP290.1
NC46: TP291.1
NC47: TP292.1
NC48: TP293.1
NC49: TP294.1
NC50: TP295.1
NC51: TP296.1
NC52: TP297.1
NC53: TP298.1
NC54: TP299.1
NC55: TP300.1
NC56: TP301.1
NC57: TP302.1
NC58: TP303.1
NC59: TP304.1
NC60: TP305.1
NC61: TP306.1
NC62: TP307.1
NC63: TP308.1
NC64: TP309.1
NC65: TP310.1
NC66: TP311.1
NC67: TP312.1
NC68: TP313.1
NC69: TP314.1
NC70: TP315.1
NC71: TP316.1
NC72: TP317.1
NC73: TP318.1
NetC2_1: C2.1 J1.1 L1.2
NetC3_1: C3.1 R4.1 R5.2 X1.1
NetC4_1: C4.1 R5.1 R6.2 X1.2
NetU2_28: U2.28
NetU2_29: U2.29
NetU2_30: U2.30
NetU2_31: U2.31
NetU2_32: U2.32
NetU2_33: U2.33
NetU2_34: U2.34
NetU2_35: U2.35
NetU2_53: U2.53
NetU2_54: U2.54
PCI_A_HSI0_N: TP282.1 TP284.1
PCI_A_HSI0_P: TP281.1 TP283.1
PCI_A_PERST_N: TP277.1
PCI_CLKREQ_N: TP280.1
PCI_REFCLK_N: TP279.1
PCI_REFCLK_P: TP278.1
PCI_SM_ALERT_N: TP273.1
PCI_SMCLK: TP274.1
PCI_SMDAT: TP276.1
PCI_WAKE: TP275.1
PWM_0: TP75.1
PWM_1: TP77.1
PWM_2: TP329.1
PWM_3: TP330.1
PWM_4: TP331.1
RGB_B0: TP260.1
RGB_B2: TP258.1
RGB_B3: TP256.1
RGB_B4: TP257.1
RGB_B5: TP254.1
RGB_CLK: TP255.1
RGB_CSN: TP248.1
RGB_DE: TP250.1
RGB_DISP: TP252.1
RGB_G0: TP266.1
RGB_G1: TP264.1
RGB_G2: TP265.1
RGB_G3: TP263.1
RGB_G4: TP261.1
RGB_G5: TP262.1
RGB_HSYNC: TP251.1
RGB_R0: TP272.1
RGB_R1: TP271.1
RGB_R2: TP270.1
RGB_R3: TP269.1
RGB_R4: TP268.1
RGB_R5: TP267.1
RGB_RSTN: TP249.1
RGB_VSYNC: TP253.1
RSV1: TP149.1
RSV2: TP150.1
RSV3: TP151.1
RSV4: TP152.1
RSV5: TP153.1
RSV6: TP154.1
RSV7: TP155.1
RTC_PWR: C10.1 C11.1 TP18.1 U2.20
TEST_GENERIC: TP142.1
TGB_B1: TP259.1
U0RXD: R2.2 U2.50
U0TXD: R3.2 U2.49
UART_CON_RX: R2.1 TP79.1
UART_CON_TX: R3.1 TP81.1
UD1: TP143.1
UD2: TP144.1
UD3: TP156.1
UD4: TP243.1
UD5: TP244.1
USB_A_VBUS: TP168.1
USB_N: R7.2 TP100.1
USB_P: R8.2 TP101.1
VBATT: TP24.1 TP27.1
VCC_2_TEST: TP21.1
VCC_3_TEST: TP111.1
VCC_4_TEST: TP112.1
VCC_5_TEST: TP157.1
VCC_6_TEST: TP158.1
VCC_IN_3V3: TP30.1
VCC_IN_5V: TP3.1 TP6.1 TP9.1 TP12.1 TP15.1
VCC_OUT_IO: TP33.1
X32_N: R4.2 U2.22
X32_P: R6.1 U2.21

## Polygon pours and split planes (outlines as drawn)
GND on L2 "NONET_L-01_P-001" (solid, remove dead copper, pour order 0): 0,30 30,30 30,0 0,0
GND on L1 "NONET_L-01_P-001" (solid, remove dead copper, pour order 1): 0,30 30,30 30,0 0,0
GND on L3 "NONET_L-01_P-001" (solid, remove dead copper, pour order 2): 0,30 30,30 30,0 0,0

## Dimensions
0,0 to 0,30 on Dimensions
0,30 to 30,30 on Dimensions